# Allegro board oboard.brd
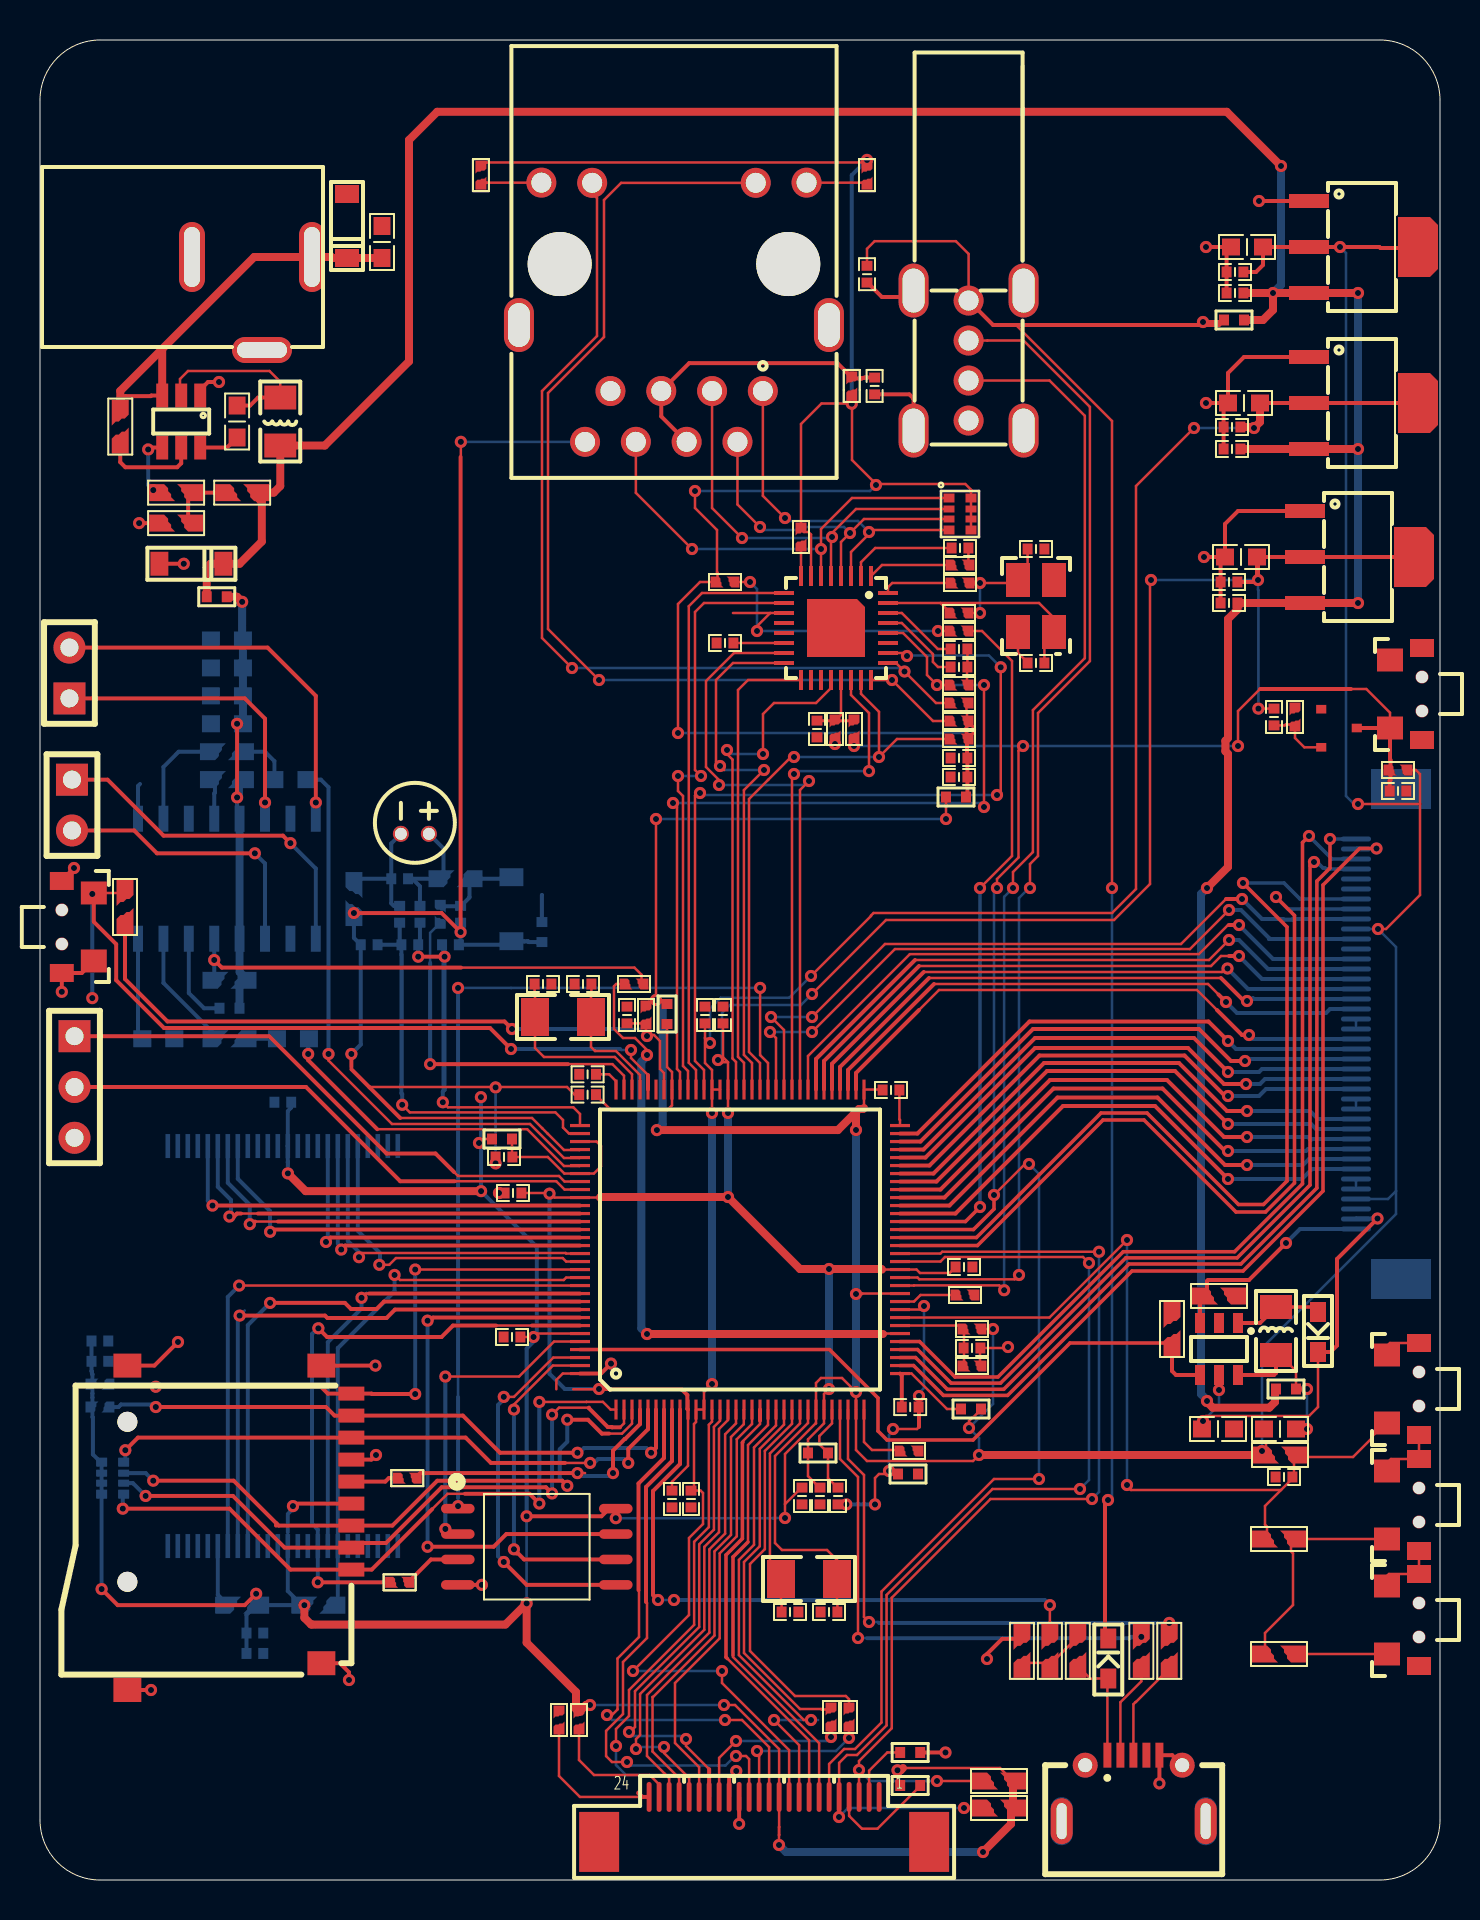
[diagram p0: board, top side]
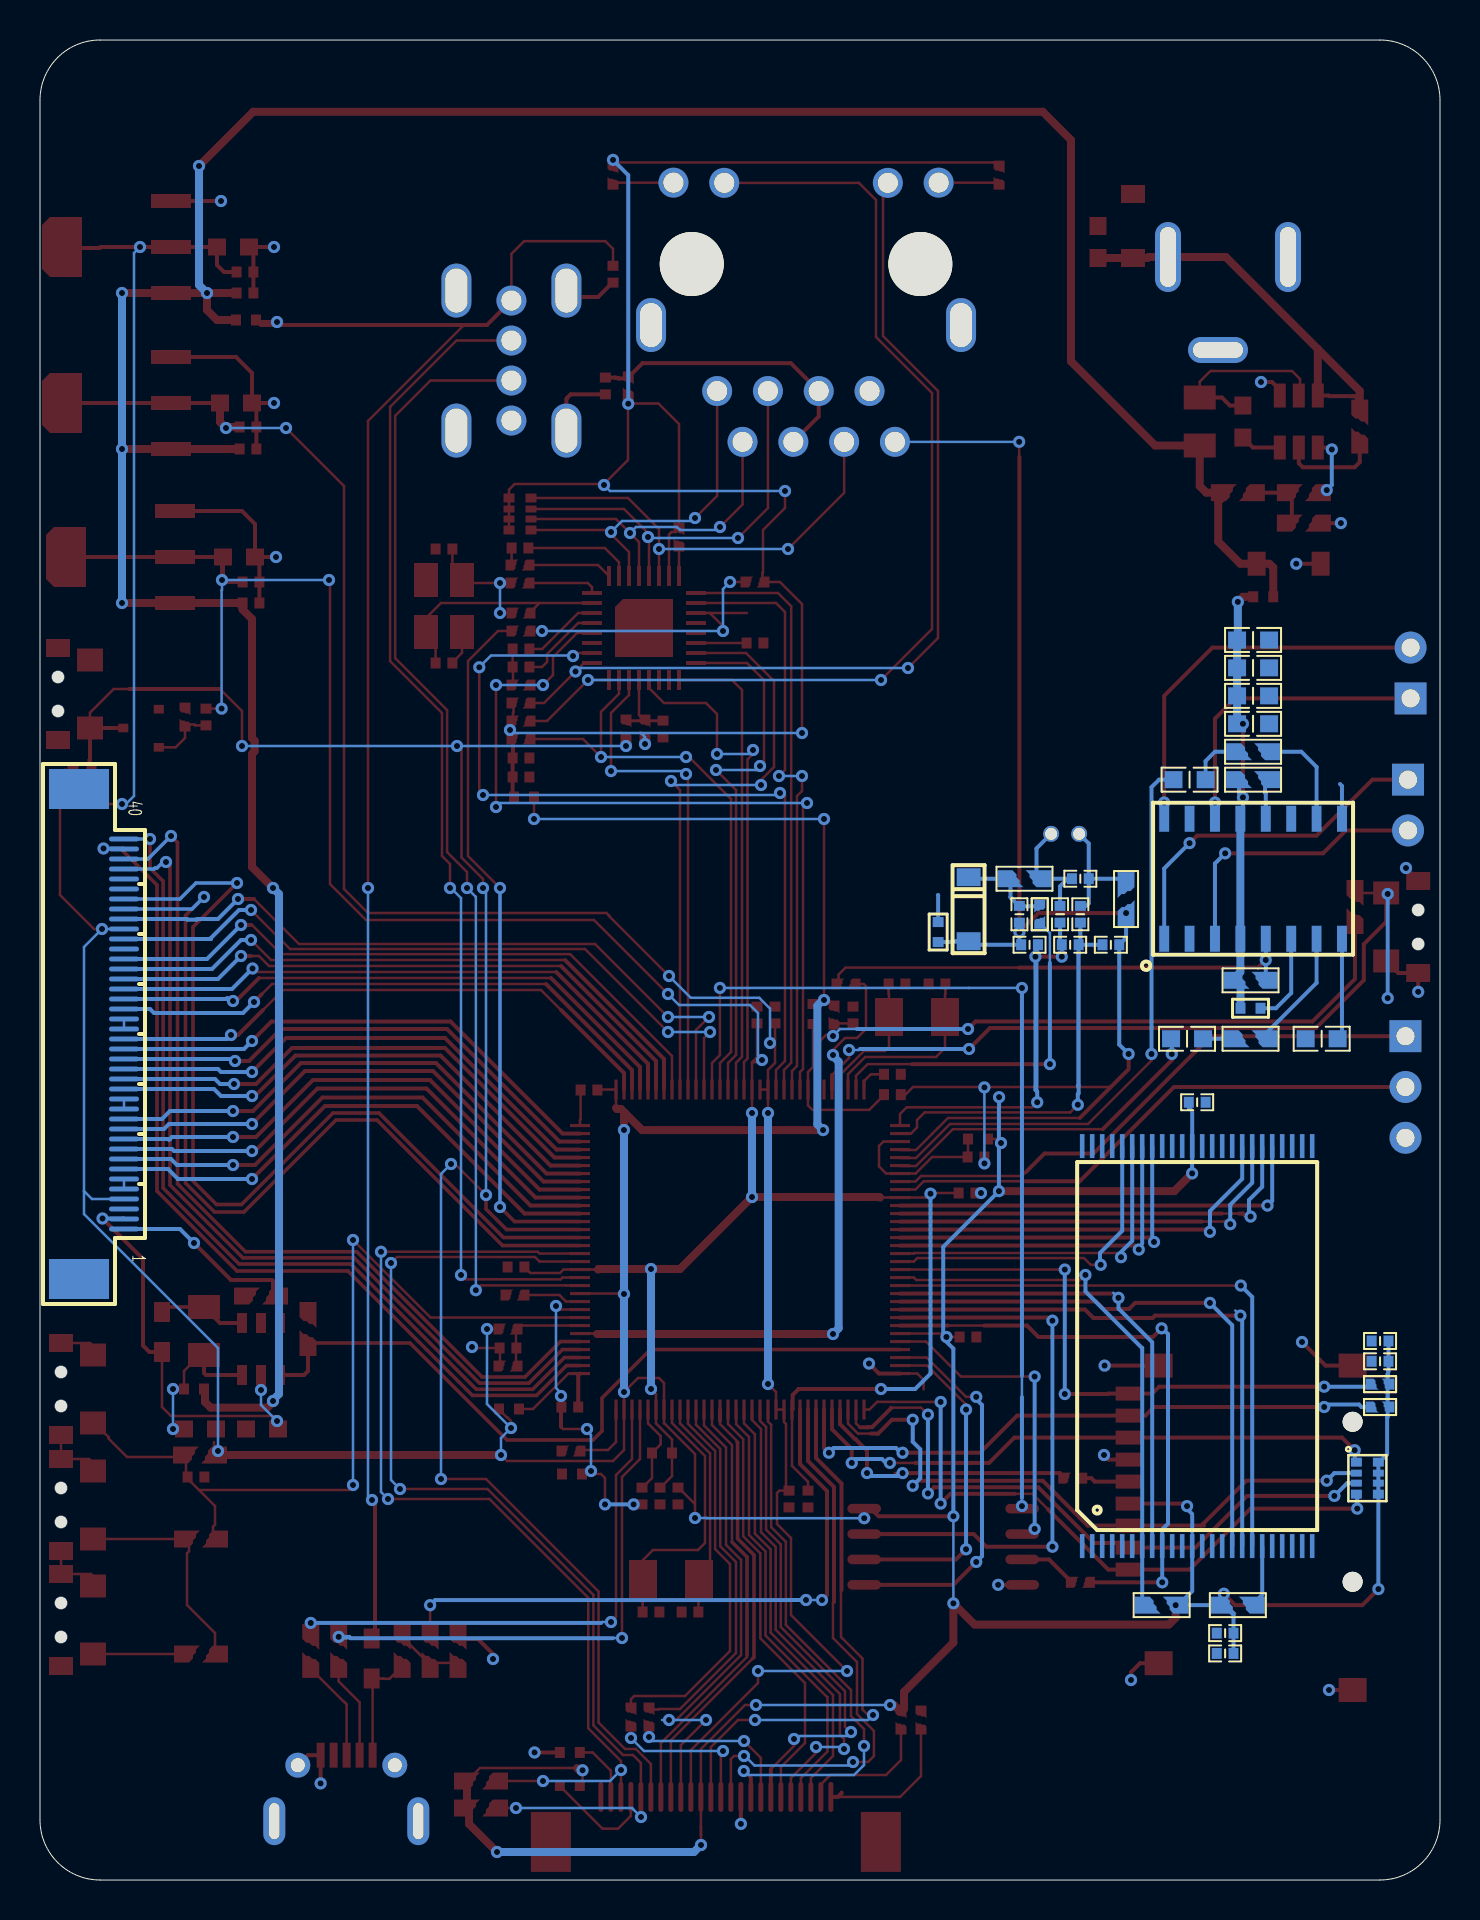
[diagram p1: board, bottom side, seen from below]

Outline 70 x 92 mm; copper layers: TOP, BOTTOM. Coordinates in mm from the lower left corner of the outline.
Outline path: 0,89 0,3 arc(0.88,0.88) 3,0 67,0 arc(69.12,0.88) 70,3 70,89 arc(69.12,91.12) 67,92 3,92 arc(0.88,91.12) 0,89

## Design rules (mm)
constraint set DEFAULT: min track width 0.127

## Placement (name value [footprint] x y rotation side)
C1  1uF  [CAP0402]  27.38 40.28 180 top
C2  15pF  [CAP0402]  27.15 44.8 180 top
C3  15pF  [CAP0402]  25.15 44.8 0 top
C4  15pF  [CAP0402]  39.45 13.4 180 top
C5  15pF  [CAP0402]  37.5 13.4 0 top
C6  0.1uF  [CAP0402]  46.6 26.6 0 top
C7  100nF  [CAP0402]  29.35 43.25 90 top
C8  100nF  [CAP0402]  34.15 43.25 90 top
C9  100nF  [CAP0402]  23.2 36.15 180 top
C11  100nF  [CAP0402]  46.2 30.65 0 top
C12  0.1uF  [CAP0402]  61.7 58.15 270 top
C14  100nF  [CAP0402]  42.55 39.5 0 top
C15  100nF  [CAP0402]  39 19.2 270 top
C16  0.1uF  [CAP0402]  67.9 54.45 0 top
C17  100nF  [CAP0402]  27.38 39.27 180 top
C18  100nF  [CAP0402]  10.74 11.33 0 bottom
C19  100nF  [CAP0402]  31.6 19.05 270 top
C20  100nF  [CAP0402]  43.51 23.65 0 top
C21  100nF  [CAP0402]  38.1 19.2 270 top
C22  100nF  [CAP0402]  23.65 34.35 180 top
C23  100nF  [CAP0402]  39.9 19.2 270 top
C24  100nF  [CAP0402]  23.6 27.15 180 top
C25  100nF  [CAP0402]  32.55 19.05 270 top
C26  100nF  [CAP0402]  33.25 43.25 90 top
C29  0.01uF  [CAP0402]  10.74 12.34 0 bottom
C30  0.01uF  [CAP0402]  12.14 38.89 180 bottom
C31  0.01uF  [CAP0402]  3 26.95 180 bottom
C32  0.01uF  [CAP0402]  3 25.93 180 bottom
C33  1uF  [CAP0603]  62 22.55 180 top
C34  0.22uF  [CAP0603]  58.9 22.55 0 top
C35  10uF  [CAP0603]  9.35 60.61 180 bottom
C36  1uF  [CAP0603]  9.35 62 180 bottom
C37  10uF  [CAP0603]  9.35 57.81 180 bottom
C38  1uF  [CAP0603]  9.35 59.21 180 bottom
C39  104  [CAP0402]  62.2 20.15 180 top
C40  220nF  [CAP0603]  12.65 42.06 180 bottom
C41  220nF  [CAP0603]  12.52 55.02 0 bottom
C42  1uF  [CAP0603]  5.92 42.06 180 bottom
C43  2.2uF  [CAP3216]  23.57 48.54 270 bottom
C44  100nF  [CAP0402]  21.03 48.29 270 bottom
C45  2.2uF  [CAP0402]  19 48.29 270 bottom
C46  470pF  [CAP0402]  18.49 46.76 0 bottom
C47  330pF  [CAP0402]  17.98 50.06 0 bottom
C48  2.2uF  [CAP0402]  17.98 48.29 270 bottom
C49  330pF  [CAP0402]  20.52 46.76 0 bottom
C50  330pF  [CAP0402]  16.46 46.76 180 bottom
C51  100nF  [CAP0402]  45.95 56.1 180 top
C52  100nF  [CAP0402]  45.95 60.65 180 top
C53  100nF  [CAP0402]  45.95 61.55 0 top
C54  100nF  [CAP0402]  45.95 55.15 180 top
C55  100nF  [CAP0402]  46 66.6 180 top
C56  100nF  [CAP0402]  34.25 61.85 180 top
C57  100nF  [CAP0402]  41.73 74.7 270 top
C58  20pF  [CAP0402]  49.8 60.85 0 top
C59  100nF  [CAP0402]  38.85 57.55 270 top
C60  20pF  [CAP0402]  49.8 66.55 180 top
C61  100nF  [CAP0402]  59.75 79.35 180 top
C62  2.2uF  [CAP0603]  60.35 81.65 180 top
C63  100nF  [CAP0402]  59.75 80.4 180 top
C64  100nF  [CAP0402]  59.6 71.55 180 top
C65  2.2uF  [CAP0603]  60.2 73.85 180 top
C66  100nF  [CAP0402]  59.6 72.65 180 top
C67  100nF  [CAP0402]  59.45 63.85 180 top
C68  2.2uF  [CAP0603]  60.05 66.15 180 top
C69  100nF  [CAP0402]  59.45 64.9 180 top
C70  1uF  [CAP0603]  9.85 72.92 270 top
C71  22uF  [CAP3216]  7.57 65.81 180 top
C72  6V/22uF  [CAP3216]  15.35 82.7 90 top
C73  6V/0.1uF  [CAP0603]  17.1 81.9 90 top
C74  0.1uF  [CAP0402]  41.35 80.29 270 top
D1  1N4148  [1N4148-SOD323]  63.9 27.4 90 top
D2  1N4148  [1N4148-SOD323]  53.41 11.08 270 top
J1  -  [TF-SOCKET]  15.57 15.52 270 top
J2  LCD_RGB_40P  [FPC-40]  68.15 42.3 270 bottom
J3  OV2640_DVP_24P  [FPC-24]  32.21 1.8 0 top
J4  Speaker Left  [HEADER1X2_2_54]  1.6 55.02 0 top
J5  Speaker Right  [HEADER1X2_2_54]  1.47 59.08 180 top
J6  Debug  [HEADER1X3_2_54]  1.73 42.19 0 top
J8  RJ45  [RJ45_13F-64GYDP2NL]  31.7 71.91 180 top
J9  USB  [USB-AF]  46.43 75.97 0 top
J10  USB  [MICROUSB]  54.69 5.74 180 top
J11  DC 005 25A  [DC_005_25A]  0.1 81.15 0 top
L1  BLM15AG102  [BLM15AG221SN1D]  23.1 37.05 0 top
L2  BLM15AG102  [BLM15AG221SN1D]  31.35 43.3 270 top
L3  22uH  [MLF2012]  61.8 27.45 90 top
L4  10uH  [BLM15AG221SN1D]  9.47 43.59 180 bottom
L5  BLM15AG102  [BLM15AG221SN1D]  45.8 54.15 0 top
L6  4.7uH  [MLF2012]  12.01 72.92 270 top
L7  BLM15AG102  [BLM15AG221SN1D]  8.84 64.16 180 top
L8  BLM15AG102  [BLM15AG221SN1D]  46.55 23.55 0 top
L9  BLM15AG102  [BLM15AG221SN1D]  38.9 21.35 180 top
L10  BLM15AG102  [BLM15AG221SN1D]  25.09 47.4 90 bottom
L11  BLM15AG102  [BLM15AG221SN1D]  59.7 78 180 top
L12  BLM15AG102  [BLM15AG221SN1D]  62.3 24.55 0 top
L13  BLM15AG102  [BLM15AG221SN1D]  43.51 4.73 180 top
L14  BLM15AG102  [BLM15AG221SN1D]  43.51 6.38 0 top
L15  BLM15AG102  [BLM15AG221SN1D]  43.4 20.3 0 top
Q1  SS8050  [SOT23]  64.95 57.6 0 top
R1  12.1K 1%  [RES0402]  43.45 21.45 0 top
R2  12.1K 1%  [RES0402]  46.25 29.25 0 top
R3  0R  [RES0402]  30.3 43.25 270 top
R4  100K  [RES0603]  4.25 48.65 90 top
R5  1K/DNP  [RES0402]  46.6 27.55 180 top
R6  10K/DNP  [RES0402]  46.6 25.7 0 top
R7  100K  [RES0402]  67.9 55.5 0 top
R8  10K  [RES0402]  62.75 58.15 90 top
R9  100K  [RES0603]  13.92 13.74 0 bottom
R10  100K  [RES0603]  10.11 13.74 180 bottom
R11  0R  [RES0402]  17.98 14.89 0 top
R12  100K  [RES0402]  3 23.65 180 bottom
R13  100K  [RES0402]  3 24.79 180 bottom
R14  22R  [RES0402]  18.36 20.09 180 top
R15  22R  [RES0402]  40.45 8.15 270 top
R16  22R  [RES0402]  39.55 8.15 270 top
R17  0R/DNP  [RES0402]  26.95 8 270 top
R18  0R/DNP  [RES0402]  25.95 8 270 top
R19  10K  [RES0603]  47.95 3.6 180 top
R20  10K  [RES0603]  47.95 4.95 180 top
R21  5R1  [RES0603]  58.95 29.2 0 top
R22  100K  [RES0603]  56.6 27.55 90 top
R23  100K  [RES0603]  62 21.25 180 top
R24  10K  [RES0603]  9.35 55.02 0 bottom
R25  10K  [RES0603]  61.95 17.05 0 top
R26  10K  [RES0603]  61.95 11.3 0 top
R28  10K  [RES0603]  9.47 42.06 180 bottom
R29  10K  [RES0603]  9.35 56.41 0 bottom
R30  10K  [RES0603]  9.47 44.98 180 bottom
R31  0R  [RES0402]  29.7 44.8 0 top
R32  0R  [RES0402]  20.01 48.29 90 bottom
R33  1.5K  [RES0603]  20.78 50.06 180 bottom
R34  5.1K  [RES0603]  15.7 49.05 90 bottom
R35  0R  [RES0402]  40.59 74.7 270 top
R36  0R  [RES0402]  45.95 62.45 180 top
R37  0R  [RES0402]  40.7 57.55 90 top
R38  10K  [RES0402]  39.75 57.55 90 top
R39  0R  [RES0402]  46 65.75 180 top
R40  1M  [RES0402]  45.95 63.35 0 top
R41  0R  [RES0402]  46 64.85 0 top
R42  4.7K  [RES0402]  38.05 67.15 90 top
R43  4.7K  [RES0402]  34.25 64.9 180 top
R44  4.7K  [RES0402]  45.95 57.05 0 top
R45  4.7K  [RES0402]  45.95 58.85 0 top
R46  330R  [RES0402]  22.05 85.24 90 top
R47  4.7K  [RES0402]  45.95 57.95 0 top
R48  330R  [RES0402]  41.35 85.24 90 top
R49  4.7K  [RES0402]  45.95 59.75 180 top
R50  100K  [RES0603]  4.01 72.67 270 top
R51  40.2K  [RES0603]  10.11 69.37 180 top
R52  75K  [RES0603]  6.81 69.37 0 top
R53  13K  [RES0603]  6.81 67.84 0 top
R54  22R  [RES0603]  55.07 11.46 90 top
R55  22R  [RES0603]  56.46 11.46 90 top
R56  10K  [RES0603]  50.49 11.46 90 top
R57  10K  [RES0603]  51.89 11.46 90 top
R58  22K  [RES0603]  49.1 11.46 90 top
RN1  10K 0402 RESAR  [RN4D02_0402]  3.63 20.09 270 bottom
RN2  49.9R 0402 RESAR  [RN4D02_0402]  46 68.3 270 top
SW1  TS_018-4.55x3.5x1.8  [TS_018-4P55X3P5X1P8]  1.09 47.65 180 top
SW2  TS_018-4.55x3.5x1.8  [TS_018-4P55X3P5X1P8]  69.1 59.3 0 top
SW3  TS_018-4.55x3.5x1.8  [TS_018-4P55X3P5X1P8]  68.95 24.55 0 top
SW4  TS_018-4.55x3.5x1.8  [TS_018-4P55X3P5X1P8]  68.95 18.75 0 top
SW5  TS_018-4.55x3.5x1.8  [TS_018-4P55X3P5X1P8]  68.95 13 0 top
U1  N3292xUxDN  [N3292XUXDN-LQFP128]  35 31.52 90 top
U2  W29N01  [W290XHVSINA-TSOP48]  12.14 26.7 90 bottom
U3  W25QXX  [W25QXX_SOP8_208MIL]  24.84 16.66 0 top
U4  PT4101  [PT4101-SOT23-6]  58.95 26.55 270 top
U5  PAM8403  [PAM8403-SOP16]  9.35 50.06 90 bottom
U6  MIC  [GMI4015-MIC]  18.74 52.86 270 top
U7  RT8201F-QFN32  [RTL8201-QFN32]  39.8 62.6 270 top
U8  AMS1117-SOT223-3-3V3  [AMS1117-SOT223-3]  66.1 81.65 270 top
U9  AMS1117-SOT223-3-1V8  [AMS1117-SOT223-3]  66.1 73.85 270 top
U10  AMS1117-SOT223-3-1V2  [AMS1117-SOT223-3]  65.9 66.15 270 top
U11  MP1470  [MP1470-TSOT23-6]  7.06 72.92 180 top
Y1  32768Hz  [CRYSTAL-3215]  26.15 43.15 180 top
Y2  12MHz  [CRYSTAL-3215]  38.45 15.05 180 top
Y3  25MHz  [YSX321SL-3_2X2_5X0_8]  49.8 63.7 90 top

## Library data of the parts
C1-C9 C11 C12 C14-C26 C29-C32 C51-C57 C59 C61 C63 C64 C66 C67 C69 C74 = CAP NP
C33-C42 C44 C46 C47 C49 C50 C58 C60 C70-C73 = CAPACITOR NON-POL
C43 C45 C48 C62 C65 C68 = CAP POL
D1 D2 = DIODE
J1 = TF-SOCKET
J2 = LCD_RGB_40P
J3 = OV2640_DVP_24P
J4 J5 = HEADER 2
J6 = HEADER 3
J8 = RJ45
J9 = USB AF
J10 = MICROUSB
J11 = DC005-25A
L1 L2 L5 L7-L15 = INDUCTOR
L3 L4 L6 = INDUCTOR/SM
Q1 = BPW37/TO
R1-R20 R35-R39 R54-R58 = RESISTOR
R21-R26 R28-R34 R40-R53 = RESISTOR/SM
RN1 RN2 = RESAR_IS_4/SM
SW1-SW5 = TS_018-4.55x3.5x1.8
U1 = N3292xUxDN
U2 = W29N01 GVSCAA
U3 = W25QXX
U4 = PT4101
U5 = PAM8403
U6 = MIC
U7 = RT8201F-QFN32
U8-U10 = ASM1117-SOT223-3
U11 = MP1470
Y1 Y2 = CRYSTAL
Y3 = YSX321SL

## Footprints (pads in the part's own frame, mm; a bottom-side part is the same pattern mirrored in y, then rotated)
1N4148-SOD323
  custom 1x0.8 smd: 1(-1,0) 2(1,0)
AMS1117-SOT223-3
  custom 0.7x2 smd: 1(-2.3,-2.65) 2(0,-2.65) 3(2.3,-2.65)
  custom 3x2 smd: 4(0,2.8)
BLM15AG221SN1D
  custom 0.5x0.55 smd: 1(-0.5,0) 2(0.5,0)
CAP0402
  custom 0.5x0.55 smd: 1(-0.42,0) 2(0.42,0)
CAP0603
  custom 0.9x0.85 smd: 1(-0.8,0) 2(0.8,0)
CAP3216
  custom 0.9x1.2 smd: 1(-1.6,0) 2(1.6,0)
CRYSTAL-3215
  custom 1.4x1.9 smd: 1(-1.4,0) 2(1.4,0)
DC_005_25A
  oval 1.3x3.5 hole 0.8x3: 1(13.5,0) 2(7.5,0)
  oval 3x1.3 hole 2.5x0.8: 3(11,-4.65)
FPC-24
  rect 2x3 smd: (-4.25,0.1) (12.25,0.1)
  oval 0.25x1.5 smd: 1(9.75,2.35) 2(9.25,2.35) 3(8.75,2.35) 4(8.25,2.35) 5(7.75,2.35) 6(7.25,2.35) 7(6.75,2.35) 8(6.25,2.35) 9(5.75,2.35) 10(5.25,2.35) 11(4.75,2.35) 12(4.25,2.35) 13(3.75,2.35) 14(3.25,2.35) 15(2.75,2.35) 16(2.25,2.35) 17(1.75,2.35) 18(1.25,2.35) 19(0.75,2.35) 20(0.25,2.35) 21(-0.25,2.35) 22(-0.75,2.35) 23(-1.25,2.35) 24(-1.75,2.35)
FPC-40
  rect 2x3 smd: (-12.25,0.1) (12.25,0.1)
  oval 0.25x1.5 smd: 1(9.75,2.35) 2(9.25,2.35) 3(8.75,2.35) 4(8.25,2.35) 5(7.75,2.35) 6(7.25,2.35) 7(6.75,2.35) 8(6.25,2.35) 9(5.75,2.35) 10(5.25,2.35) 11(4.75,2.35) 12(4.25,2.35) 13(3.75,2.35) 14(3.25,2.35) 15(2.75,2.35) 16(2.25,2.35) 17(1.75,2.35) 18(1.25,2.35) 19(0.75,2.35) 20(0.25,2.35) 21(-0.25,2.35) 22(-0.75,2.35) 23(-1.25,2.35) 24(-1.75,2.35) 25(-2.25,2.35) 26(-2.75,2.35) 27(-3.25,2.35) 28(-3.75,2.35) 29(-4.25,2.35) 30(-4.75,2.35) 31(-5.25,2.35) 32(-5.75,2.35) 33(-6.25,2.35) 34(-6.75,2.35) 35(-7.25,2.35) 36(-7.75,2.35) 37(-8.25,2.35) 38(-8.75,2.35) 39(-9.25,2.35) 40(-9.75,2.35)
GMI4015-MIC
  round 0.8 hole 0.6: 1(0.55,0.7) 2(0.55,-0.7)
HEADER1X2_2_54
  rect 1.6x1.6 hole 0.9: 1(0,0)
  round 1.6 hole 0.9: 2(0,-2.54)
HEADER1X3_2_54
  rect 1.6x1.6 hole 0.9: 1(0,0)
  round 1.6 hole 0.9: 2(0,-2.54) 3(0,-5.08)
MICROUSB
  rect 0.4x1.25 smd: 1(1.315,-0.5) 2(0.665,-0.5) 3(0.015,-0.5) 4(-0.635,-0.5) 5(-1.285,-0.5)
  round 1.25 hole 0.7: 6(-2.425,0) 7(2.425,0)
  oval 1.1x2.3 hole 0.5x1.8: 8(-3.6,2.8) 9(3.6,2.8)
MLF2012
  custom 1.2x1.6 smd: 1(-1.2,0) 2(1.2,0)
MP1470-TSOT23-6
  custom 0.6x1.2 smd: 1(-0.95,-1.3) 2(0,-1.3) 3(0.95,-1.3) 4(0.95,1.3) 5(0,1.3) 6(-0.95,1.3)
N3292XUXDN-LQFP128
  custom 1x0.16 smd: 1(-8,6.2) 2(-8,5.8) 3(-8,5.4) 4(-8,5) 5(-8,4.6) 6(-8,4.2) 7(-8,3.8) 8(-8,3.4) 9(-8,3) 10(-8,2.6) 11(-8,2.2) 12(-8,1.8) 13(-8,1.4) 14(-8,1) 15(-8,0.6) 16(-8,0.2) 17(-8,-0.2) 18(-8,-0.6) 19(-8,-1) 20(-8,-1.4) 21(-8,-1.8) 22(-8,-2.2) 23(-8,-2.6) 24(-8,-3) 25(-8,-3.4) 26(-8,-3.8) 27(-8,-4.2) 28(-8,-4.6) 29(-8,-5) 30(-8,-5.4) 31(-8,-5.8) 32(-8,-6.2) 65(8,-6.2) 66(8,-5.8) 67(8,-5.4) 68(8,-5) 69(8,-4.6) 70(8,-4.2) 71(8,-3.8) 72(8,-3.4) 73(8,-3) 74(8,-2.6) 75(8,-2.2) 76(8,-1.8) 77(8,-1.4) 78(8,-1) 79(8,-0.6) 80(8,-0.2) 81(8,0.2) 82(8,0.6) 83(8,1) 84(8,1.4) 85(8,1.8) 86(8,2.2) 87(8,2.6) 88(8,3) 89(8,3.4) 90(8,3.8) 91(8,4.2) 92(8,4.6) 93(8,5) 94(8,5.4) 95(8,5.8) 96(8,6.2)
  custom 0.16x1 smd: 33(-6.2,-8) 34(-5.8,-8) 35(-5.4,-8) 36(-5,-8) 37(-4.6,-8) 38(-4.2,-8) 39(-3.8,-8) 40(-3.4,-8) 41(-3,-8) 42(-2.6,-8) 43(-2.2,-8) 44(-1.8,-8) 45(-1.4,-8) 46(-1,-8) 47(-0.6,-8) 48(-0.2,-8) 49(0.2,-8) 50(0.6,-8) 51(1,-8) 52(1.4,-8) 53(1.8,-8) 54(2.2,-8) 55(2.6,-8) 56(3,-8) 57(3.4,-8) 58(3.8,-8) 59(4.2,-8) 60(4.6,-8) 61(5,-8) 62(5.4,-8) 63(5.8,-8) 64(6.2,-8) 97(6.2,8) 98(5.8,8) 99(5.4,8) 100(5,8) 101(4.6,8) 102(4.2,8) 103(3.8,8) 104(3.4,8) 105(3,8) 106(2.6,8) 107(2.2,8) 108(1.8,8) 109(1.4,8) 110(1,8) 111(0.6,8) 112(0.2,8) 113(-0.2,8) 114(-0.6,8) 115(-1,8) 116(-1.4,8) 117(-1.8,8) 118(-2.2,8) 119(-2.6,8) 120(-3,8) 121(-3.4,8) 122(-3.8,8) 123(-4.2,8) 124(-4.6,8) 125(-5,8) 126(-5.4,8) 127(-5.8,8) 128(-6.2,8)
PAM8403-SOP16
  custom 1.3x0.5 smd: 1(-3,4.445) 2(-3,3.175) 3(-3,1.905) 4(-3,0.635) 5(-3,-0.635) 6(-3,-1.905) 7(-3,-3.175) 8(-3,-4.445) 9(3,-4.445) 10(3,-3.175) 11(3,-1.905) 12(3,-0.635) 13(3,0.635) 14(3,1.905) 15(3,3.175) 16(3,4.445)
PT4101-SOT23-6
  custom 1x0.5 smd: 1(-1.3,0.95) 2(-1.3,0) 3(-1.3,-0.95) 4(1.3,-0.95) 5(1.3,0) 6(1.3,0.95)
RES0402
  custom 0.65x0.55 smd: 1(-0.4,0) 2(0.4,0)
RES0603
  custom 1.3x0.85 smd: 1(-0.7,0) 2(0.7,0)
RJ45_13F-64GYDP2NL
  round 1.5 hole 1: 1(-4.445,-2.54) 2(-3.175,0) 3(-1.905,-2.54) 4(-0.635,0) 5(0.635,-2.54) 6(1.905,0) 7(3.175,-2.54) 8(4.445,0) 9(-6.63,-12.96) 10(-4.09,-12.95) 11(4.09,-12.95) 12(6.63,-12.96)
  round 3.201 hole 3.2: M1(-5.715,-8.89) M2(5.715,-8.89)
  oval 1.5x2.7 hole 1.1x2.2: M3(-7.75,-5.84) M4(7.75,-5.84)
RN4D02_0402
  rect 0.45x0.55 smd: 1(-0.8,-0.55) 4(0.8,-0.55) 5(0.8,0.55) 8(-0.8,0.55)
  rect 0.35x0.55 smd: 2(-0.25,-0.55) 3(0.25,-0.55) 6(0.25,0.55) 7(-0.25,0.55)
RTL8201-QFN32
  custom 1x0.2 smd: 1(-2.6,1.75) 2(-2.6,1.25) 3(-2.6,0.75) 4(-2.6,0.25) 5(-2.6,-0.25) 6(-2.6,-0.75) 7(-2.6,-1.25) 8(-2.6,-1.75) 17(2.6,-1.75) 18(2.6,-1.25) 19(2.6,-0.75) 20(2.6,-0.25) 21(2.6,0.25) 22(2.6,0.75) 23(2.6,1.25) 24(2.6,1.75)
  custom 0.2x1 smd: 9(-1.75,-2.6) 10(-1.25,-2.6) 11(-0.75,-2.6) 12(-0.25,-2.6) 13(0.25,-2.6) 14(0.75,-2.6) 15(1.25,-2.6) 16(1.75,-2.6) 25(1.75,2.6) 26(1.25,2.6) 27(0.75,2.6) 28(0.25,2.6) 29(-0.25,2.6) 30(-0.75,2.6) 31(-1.25,2.6) 32(-1.75,2.6)
  custom 2.9x2.9 smd: 33(0,0)
SOT23
  rect 0.508x0.432 smd: 1(-0.889,0.94) 2(-0.889,-0.965) 3(0.889,0)
TF-SOCKET
  round 1 hole 1.1 unplated: (-7.39,-11.2) (0.61,-11.2)
  rect 0.7x1.3 smd: 1(0,0) 2(-1.1,0) 3(-2.2,0) 4(-3.3,0) 5(-4.4,0) 6(-5.5,0) 7(-6.6,0) 8(-7.7,0) 9(-8.8,0)
  rect 1.2x1.4 smd: 10(-10.2,-1.5) 11(4.68,-1.5) 12(-10.2,-11.2) 13(6.02,-11.2)
TS_018-4P55X3P5X1P8
  round 0.65 hole 0.6: (0,0.85) (0,-0.85)
  custom 1.2x0.9 smd: 1(0,2.3) 2(0,-2.3)
  custom 1.3x1.15 smd: 3(-1.6,1.7) 4(-1.6,-1.7)
USB-AF
  round 1.5 hole 1: 1(0,3) 2(0,1) 3(0,-1) 4(0,-3)
  oval 1.5x2.7 hole 1.1x2.2: 5(-2.75,3.5) 6(2.75,3.5) 7(-2.75,-3.5) 8(2.75,-3.5)
W25QXX_SOP8_208MIL
  custom 1.68x0.48 smd: 1(-3.95,1.905) 2(-3.95,0.635) 3(-3.95,-0.635) 4(-3.95,-1.905) 5(3.95,-1.905) 6(3.95,-0.635) 7(3.95,0.635) 8(3.95,1.905)
W290XHVSINA-TSOP48
  custom 1.2x0.23 smd: 1(-10,5.75) 2(-10,5.25) 3(-10,4.75) 4(-10,4.25) 5(-10,3.75) 6(-10,3.25) 7(-10,2.75) 8(-10,2.25) 9(-10,1.75) 10(-10,1.25) 11(-10,0.75) 12(-10,0.25) 13(-10,-0.25) 14(-10,-0.75) 15(-10,-1.25) 16(-10,-1.75) 17(-10,-2.25) 18(-10,-2.75) 19(-10,-3.25) 20(-10,-3.75) 21(-10,-4.25) 22(-10,-4.75) 23(-10,-5.25) 24(-10,-5.75) 25(10,-5.75) 26(10,-5.25) 27(10,-4.75) 28(10,-4.25) 29(10,-3.75) 30(10,-3.25) 31(10,-2.75) 32(10,-2.25) 33(10,-1.75) 34(10,-1.25) 35(10,-0.75) 36(10,-0.25) 37(10,0.25) 38(10,0.75) 39(10,1.25) 40(10,1.75) 41(10,2.25) 42(10,2.75) 43(10,3.25) 44(10,3.75) 45(10,4.25) 46(10,4.75) 47(10,5.25) 48(10,5.75)
YSX321SL-3_2X2_5X0_8
  custom 1.7x1.2 smd: 1(-1.3,-0.9) 2(1.3,-0.9) 3(1.3,0.9) 4(-1.3,0.9)

## Nets
AVDD1V2: C23.1 L9.1 U1.28
AVDD3V3: C20.1 L8.1 U1.33
AVDD3V3_AUDIO: C9.1 L1.2 U1.99 U1.103
AVDD3V3_TV: C17.1 L2.2 U1.89
AVDD5V: C35.1 C36.1 C37.1 C38.1 L4.1 L7.1 R24.2 R30.1 U5.4 U5.13
DVDD1V2: C8.1 C11.1 C12.1 C15.1 C19.1 C22.1 C68.1 C69.1 L9.2 U1.10 U1.27 U1.46 U1.82 U1.106 U10.2 U10.4(VOUT)
DVDD1V8: C25.1 C26.1 C65.1 C66.1 J3.10 U1.11 U1.12 U1.83 U1.84 U9.2 U9.4(VOUT)
DVDD5V: C61.1 C64.1 C67.1 C71.1 L6.2 L7.2 L11.1 L12.1 R51.1 U8.3 U9.3 U10.3
DVDD33: C14.1 C18.1 C21.1 C24.1 C29.1 C30.1 C31.2 C32.2 C62.1 C63.1 J1.4(VDD) J2.4 J2.31 J3.11 L1.1 L2.1 L5.1 L8.2 L13.2 R3.1 R5.1 R7.2 R9.1 R10.1 R12.2 R13.2 R17.1 R19.1 R20.1 R23.2 RN1.5 RN1.6 RN1.7 RN1.8 U1.26 U1.31 U1.43 U1.65 U1.123 U2.12 U2.37 U3.8 U8.2 U8.4(VOUT)
GND: C1.2 C2.2 C3.2 C4.2 C5.2 C6.2 C7.2 C8.2 C11.2 C14.2 C15.2 C16.2 C18.2 C19.2 C21.2 C22.2 C24.2 C25.2 C26.2 C29.2 C30.2 C31.1 C32.1 C33.2 C34.2 C35.2 C36.2 C37.2 C38.2 C39.2 C42.1 C51.2 C52.1 C53.2 C54.2 C55.1 C56.2 C57.2 C58.1 C59.2 C60.1 C61.2 C62.2 C63.2 C64.2 C65.2 C66.2 C67.2 C68.2 C69.2 C71.2 C72.2 C73.2 C74.2 J1.6 J1.10 J1.11 J1.12 J1.13 J2.3 J2.5 J2.6 J2.13 J2.14 J2.21 J2.22 J2.29 J2.36 J3.15 J6.3 J9.4 J9.5 J9.6 J9.7 J9.8 J10.5 J10.6 J10.7 J10.8 J10.9 J11.2(COM) J11.3 L10.2 L14.2 L15.2 Q1.1(EMITTER) R1.2 R2.2 R6.2 R8.2 R18.1 R21.2 R22.2 R39.1 R49.1 R53.1 R58.2 SW1.1 SW1.2 SW1.3 SW2.1 SW2.2 SW2.3 SW3.1 SW3.2 SW3.3 SW4.1 SW4.2 SW4.3 SW5.1 SW5.2 SW5.3 U1.64 U1.128 U2.13 U2.36 U3.4 U4.2 U5.2 U5.9 U5.11 U5.15 U7.33 U8.1 U9.1 U10.1 U11.1 Y3.2 Y3.4
GND_FIELD SIGNAL: C20.2 C23.2 L15.1 U1.41
GND_SIGNAL: C9.2 C17.2 C43.2 C44.2 C49.2 C50.2 J8.8 L10.1 R34.1 U1.100
PVIN: C72.1 C73.1 J11.1 R50.1 U11.3
VBUS: C74.1 D2.1(K) J9.1(VBUS) L11.2
ADC_MID: C1.1 U1.96
AHS: C6.1 R5.2 R6.1 U1.39
BL_5V: C33.1 L3.1 L12.2 U4.6
BL_ADJ: R22.1 U1.125 U4.4
DEBUG_RX: J6.2 U1.105
DEBUG_TX: J6.1 U1.104
ETH_CRS: U1.85 U7.26
ETH_INT: R36.1 U1.52
ETH_INT_PU: R36.2 R43.1 U7.11
ETH_LED0+: J8.9 R48.1
ETH_LED0-: J8.10 R47.1 U7.24
ETH_LED1+: J8.12 R46.1
ETH_LED1-: J8.11 R45.1 U7.25
ETH_MDC: U1.74 U7.22
ETH_MDIO: R44.1 U1.78 U7.23
ETH_REFCLK: U1.73 U7.15
ETH_RESET: C16.1 J3.6 Q1.3 R7.1 R37.1 SW2.4 U1.51
ETH_RXD0: U1.86 U7.9
ETH_RXD1: U1.87 U7.10
ETH_RXDV: R42.1 U7.8
ETH_RXER: R49.2 U1.88 U7.28
ETH_TXD0: U1.79 U7.16
ETH_TXD1: U1.80 U7.17
ETH_TXEN: U1.81 U7.20(TXEN)
ETH_VCCD: C51.1 C54.1 L5.2 R35.2 R38.1 R42.2 R43.2 R44.2 R45.2 R46.2 R47.2 R48.2 RN2.5 RN2.6 RN2.7 RN2.8 U7.7
GPG7: R31.1 U1.38
HPOUTL: C40.1 U1.102
HPOUTR: C41.2 U1.101
ISI_HSYNC: J3.9 U1.21
ISI_PCLK: R16.1 U1.22
ISI_PWDN: J3.8 U1.19
ISI_SCL: J3.5 R19.2 U1.47
ISI_SCLK: R15.1 U1.23
ISI_SDA: J3.3 R20.2 U1.48
ISI_VSYNC: J3.7 U1.20
LED+: C34.1 D1.1(K) J2.2 U4.5
LED-: J2.1 R21.1 U4.3
LHSYNC: J2.32 U1.75
LPCLK: J2.30 U1.76
LRADC: C39.1 R23.1 R25.1 SW3.4 U1.40
LVD0: J2.23 U1.67
LVD1: J2.24 U1.68
LVD2: J2.25 U1.69
LVD3: J2.26 U1.70
LVD4: J2.27 U1.71
LVD5: J2.28 U1.72
LVD6: J2.15 U1.59
LVD7: J2.16 U1.60
LVD8: J2.17 U1.61
LVD9: J2.18 U1.62
LVD10: J2.19 U1.63
LVD11: J2.20 U1.66
LVD12: J2.7 U1.53
LVD13: J2.8 U1.54
LVD14: J2.9 U1.55
LVD15: J2.10 U1.56
LVD16: J2.11 U1.57
LVD17: J2.12 U1.58
LVDE: J2.34 U1.50
LVSYNC: J2.33 U1.49
MIC_BIAS: R32.1 U1.95
MIC_INN: C46.1 C48.2 C50.1 U1.98
MIC_INP: C45.2 C46.2 C49.1 U1.97
MUTE: R30.2 R31.2 U5.5
NALE: U1.120 U2.17
NBUSY0: R9.2 U1.116 U2.7
NCLE: U1.119 U2.16
NCS0: R11.1 U1.122 U2.9
NCS1: U1.121 U3.7
ND0: U1.107 U2.29
ND1: U1.108 U2.30
ND2: U1.109 U2.31
ND3: U1.110 U2.32
ND4: U1.111 U2.41
ND5: U1.112 U2.42
ND6: U1.113 U2.43
ND7: U1.114 U2.44
NRE: U1.118 U2.8
NWR: U1.117 U2.18
OUTLM: J4.2 U5.3
OUTLP: J4.1 U5.1
OUTRM: J5.1 U5.14
OUTRP: J5.2 U5.16
RTC_XIN: C2.1 U1.93 Y1.1
RTC_XOUT: C3.1 U1.94 Y1.2
RTCVDD33: C7.1 R3.2 R4.1 U1.90
SD_CD: J1.9 R13.1 U1.115
SD_CLK: R14.1 U1.4
SD_CMD: J1.3 RN1.2 U1.3
SD_D0: J1.7 RN1.1 U1.5
SD_D1: J1.8 R12.1 U1.6
SD_D2: J1.1 RN1.4 U1.1
SD_D3: J1.2 RN1.3 U1.2
SF_CLK: U1.127 U3.6
SF_CS: U1.77 U3.1
SF_DI: U1.126 U3.5
SF_DO: U1.124 U3.2
SPD0: J3.19 U1.18
SPD1: J3.21 U1.17
SPD2: J3.22 U1.16
SPD3: J3.20 U1.15
SPD4: J3.18 U1.14
SPD5: J3.16 U1.13
SPD6: J3.14 U1.8
SPD7: J3.12(Y9) U1.7
TP_XM: J2.39 U1.34
TP_XP: J2.37 U1.36
TP_YM: J2.40(YU) U1.35
TP_YP: J2.38 U1.37
UD_REXT: R1.1 U1.32
UH_DM: J9.2 U1.45
UH_DP: J9.3 U1.44
UH_REXT: R2.1 U1.42
USB_DET: R56.2 U1.9
USB_DM: R54.2 U1.29
USB_DP: R55.2 U1.30
USB_VIN: D2.2 J10.1(VBUS) R57.1
XIN: C4.1 U1.25 Y2.1
XOUT: C5.1 U1.24(XOUT) Y2.2
N04211: R10.2 U2.19(W\P\)
N06862: J1.5 R14.2
N09654: R11.2 U3.3(W\P\/IO2)
N15646006: J3.13 R15.2
N15646070: J3.17 R16.2
N15663479: C52.2 U7.29
N15663486: C55.2 U7.2
N15663493: C56.1 U7.14
N15663500: C53.1 U7.30
N15663575: C59.1 R37.2 R38.2 U7.21
N15663676: R39.2 U7.1
N15663702: R41.1 U7.32
N15664512: C60.2 R40.2 R41.2 Y3.3(XOUT)
N15664809: C58.2 R40.1 U7.31 Y3.1
N15668493: J8.1 RN2.4 U7.3
N15668513: J8.2(TD-) RN2.3 U7.4
N15668525: J8.3 RN2.2 U7.5
N15668529: J8.6 RN2.1 U7.6
N15668719: C57.1 J8.4 J8.5 R35.1
N15674337: R25.2 R26.1 SW4.4
N15674345: R26.2 SW5.4
N15676008: R24.1 U5.12
N15676062: L4.2 U5.6
N15676114: C40.2 R28.1
N15676138: R28.2 U5.7
N15676142: R29.1 U5.10
N15676150: C41.1 R29.2
N15676164: C42.2 U5.8(VREF)
N15687660: C70.2 U11.6
N15687760: C70.1 L6.1 U11.2(SW)
N15687792: R50.2 U11.5
N15687876: R51.2 R52.2 R53.2
N15687912: R52.1 U11.4
N15691835: D1.2 L3.2 U4.1(SW)
N15705525: C43.1 C44.1 R32.2 R33.1
N15705529: C45.1 C47.2 R33.2 U6.1
N15705631: C47.1 C48.1 R34.2 U6.2(-)
N15714383: J10.2 R54.1
N15714387: J10.3 R55.1
N15739714: R4.2 SW1.4 U1.92
N15742573: C12.2 Q1.2 R8.1
N15750041: R56.1 R57.2 R58.1
N15763803: J3.24 R18.2
N15763807: J3.23 R17.2
N15841040: J3.4 L13.1
N15841559: J3.2 L14.1

Pads without a net: J2 35; J3 1; J8 7 M1 M2 M3 M4; J10 4; U1 91; U2 1 2 3 4 5 6 10 11 14 15 20 21 22 23 24 25 26 27 28 33 34 35 38 39 40 45 46 47 48; U7 12 13 18 19 27

## Via types
v1: diameter 0.61, hole 0.305, TOP to BOTTOM, 292 vias

## Routing (per net, layer and track width the routed paths; a pad name or vN(x,y) marks a point on that pad's centre or on a via; arc(x,y) is an arc through that point)
AVDD1V2: length 4.6
  TOP w0.127: U1.28 39.6,22.83 38.97,22.2 38.97,21.78 L9.1 39.4,20.09 39.88,19.62 C23.1
AVDD3V3: length 5.5
  TOP w0.127: L8.1 45.35,23.55 43.58,25.32 U1.33
  TOP w0.2: C20.1 43.09,25.23 U1.33
AVDD3V3_AUDIO: length 8
  TOP w0.127: L1.2 23.6,36.17 C9.1 25.39,36.15 26.22,35.32 U1.103 27.69,35.32 28.05,35.68 28.05,36.7 27.83,36.92 U1.99
AVDD3V3_TV: length 8.4
  TOP w0.127: L2.2 31.35,40.65 31.6,40.4 U1.89 31.6,38.73 31.38,38.51 28.54,38.51 27.8,39.24 C17.1
AVDD5V: length 22.7
  TOP w0.2: v1(9.85,57.81) v1(9.85,54.13)
  TOP w0.4: v1(10.11,63.91) 9.85,64.16 L7.1
  BOTTOM w0.127: C37.1 v1(9.85,57.81)
  BOTTOM w0.2: U5.13 9.85,53.19 v1(9.85,54.13) 10.05,54.32 R24.2 ; 10.11,62.69 10.11,62.79
  BOTTOM w0.4: C37.1 C38.1 C35.1 C36.1 10.11,62.04 10.11,62.69 ; U5.13 U5.4 9.98,45.4 10.17,45.21 R30.1 9.97,44.78 L4.1 ; 10.11,62.79 v1(10.11,63.91)
DVDD1V2: length 139.5
  TOP w0.127: U1.10 32.4,20.71 31.6,19.91 C19.1 ; v1(39.45,24.55) 39.2,24.3 U1.27 39.2,22.83 38.4,22.03 L9.2 38.4,20.2 38.98,19.62 C15.1 ; C22.1 25.44,34.35 v1(25.48,34.32) 25.54,34.32 25.73,34.12 U1.106 28,34.12 ; C11.1 45.48,30.35 44,30.35 43.83,30.52 U1.46 39.4,30.52 39.43,30.55 ; 34.4,40.89 34.15,41.14 C8.1 ; 34.4,40.89 34.01,40.89 v1(33.9,41) ; 34.4,40.89 U1.82 v1(34.4,38.35) ; C12.1 v1(60.92,58.57) ; v1(38.6,44.3) 42.3,48 53.7,48 55.5,49.8 55.5,64.9 55.55,64.95 v1(55.55,65) ; 32.08,24.54 26.66,24.54
  TOP w0.2: C69.1 60.65,64.9 60.85,65.1 C68.1 ; U1.10 32.37,23.55 32.37,24.25 32.07,24.55 v1(27.95,24.55) ; C68.1 60.9,66.1 v1(60.9,65) ; C68.1 U10.2 U10.4
  TOP w0.4: v1(39.45,30.55) 42.07,30.55 42.1,30.52 ; 28,34.12 28.03,34.15 v1(34.4,34.15) 38,30.55 39.43,30.55
  BOTTOM w0.127: v1(55.55,65) v1(60.9,65) 60.9,64.5 60.92,64.48 v1(60.92,58.57) ; v1(38.6,44.3) 38.05,43.75 34.5,43.75 34.1,43.35 34.1,41.25 33.9,41.05 v1(33.9,41)
  BOTTOM w0.2: v1(27.95,24.55) 26.24,24.55 25.48,25.32 v1(25.48,34.32)
  BOTTOM w0.4: v1(34.4,34.15) v1(34.4,38.35) ; v1(39.45,24.55) v1(39.45,30.55)
DVDD1V8: length 110.8
  TOP w0.127: v1(34.1,10.45) 34.1,9.85 37.46,6.49 J3.10 ; v1(38.55,45.2) 41.55,48.2 41.55,48.22 41.68,48.35 53.6,48.35 54.8,49.55 54.8,69.7 v1(57.7,72.6) ; C26.1 33.25,42.1 ; 33.25,42.1 33.25,40.85 33.6,40.5 U1.84 ; 33.25,42.1 v1(33.5,41.85) ; U1.84 v1(33.6,38.35) ; U1.84 U1.83 ; v1(33.6,24.8) 33.2,24.4 U1.12 U1.11 32.8,22.9 32.7,22.8 32.7,19.62 C25.1 33.03,19.47 33.15,19.35 33.15,17.8 32.45,17.1 32.45,13.25 v1(29.65,10.45)
  TOP w0.2: U9.4 U9.2 C65.1
  TOP w0.4: C65.1 61,72.9 v1(60.7,72.6) 60.65,72.65 C66.1
  BOTTOM w0.127: v1(29.65,10.45) v1(34.1,10.45) ; v1(38.55,45.2) 37.46,44.11 34.04,44.11 33.5,43.57 v1(33.5,41.85) ; v1(57.7,72.6) v1(60.7,72.6)
  BOTTOM w0.4: v1(33.6,38.35) v1(33.6,24.8)
DVDD5V: length 163.4
  TOP w0.127: 59.4,57.09 59.4,56.31
  TOP w0.4: L7.2 8.34,65.62 8.53,65.81 C71.1 9.98,65.81 11.09,66.92 11.09,68.91 10.81,69.19 R51.1 11.68,69.37 12.01,69.7 L6.2 14.24,71.72 18.45,75.93 18.45,87 19.86,88.41 59.34,88.41 v1(62.05,85.7) ; v1(65.9,79.35) U8.3 v1(61.65,79.35) ; C61.1 v1(61.65,79.35) ; v1(61.65,79.35) 61.65,78.5 61.15,78 L11.1 ; v1(58.35,49.6) 59.4,50.65 59.4,56.31 59.27,56.44 59.27,56.96 59.4,57.09 59.4,63.05 59.87,63.52 C67.1 U10.3 v1(65.9,63.85) ; v1(58.35,23.95) 58.35,23.9 58.63,23.62 61.47,23.62 61.75,23.9 61.75,24.5 L12.1 ; v1(65.9,71.55) U9.3 C64.1
  BOTTOM w0.4: v1(65.9,63.85) v1(65.9,71.55) v1(65.9,79.35) ; v1(62.05,85.7) 62.05,79.75 v1(61.65,79.35) ; v1(58.35,23.95) 58.35,24 58.05,24.3 58.05,49.3 v1(58.35,49.6)
DVDD33: length 349
  TOP w0.127: v1(42.87,5.49) 42.87,4.86 L13.2 ; 61.3,21.9 61.3,21.65 v1(61.1,21.45) ; L2.1 31.25,43.9 30.8,43.9 ; 37.25,18.8 37.25,21.3 38.78,22.83 38.8,22.83 U1.26 38.8,24.85 39.05,25.1 40.1,25.1 v1(40.8,24.4) U1.31 40.8,21.5 41.35,20.95 46.65,20.95 v1(46.95,21.25) ; 37.25,18.8 38.08,19.62 C21.1 ; 37.25,18.8 v1(37.25,18.1) ; C14.1 42.11,39.52 U1.65 41.2,38.6 ; v1(46.45,22.6) 46.45,22.95 46.64,23.14 46.67,23.14 47.05,23.52 L8.2 ; v1(21.95,36.85) 22.15,37.05 L1.1 ; U1.123 24.85,27.32 v1(24.68,27.15) C24.1 ; 36.95,2.25 v1(36.95,1.75) ; 36.95,2.25 36.95,2.65 36.96,2.65 ; 36.95,2.25 36.96,2.25 36.96,2.65 ; v1(66.9,47.55) 67.3,47.55 69,49.25 69,53.8 ; 36.96,2.65 J3.11 36.96,6.54 34.75,8.75 v1(34.2,8.75) ; 69,53.8 v1(65.9,53.8) ; 69,53.8 69,55.29 68.79,55.5 R7.2 ; 13.63,12.77 13.75,12.65 23.15,12.65 23.27,12.77 ; 43.15,5.6 48,5.6 R20.1 ; v1(12.65,18.7) 12.77,18.82 12.9,18.82 ; R3.1 30.3,43.78 30.43,43.9 30.8,43.9 ; 30.8,43.9 v1(30.8,44) v1(30.8,53.05) ; v1(47.65,27.55) R5.1 ; U3.8 v1(28.79,18.09) ; v1(40.8,29.3) 41.1,29.3 41.12,29.32 U1.43 ; v1(45.3,53.05) L5.1
  TOP w0.2: v1(24.33,18.19) 28.07,18.19 28.45,18.57 U3.8 ; J1.4 12.9,18.82 ; U8.4 68.85,81.6 67.02,81.6 66.97,81.65 v1(65,81.65) U8.2 C62.1 61.15,80.75 60.8,80.4 C63.1 ; v1(10.81,14.31) 10.24,13.74 3.89,13.74 v1(3.08,14.55)
  TOP w0.4: 41.2,38.6 41.15,38.55 40.95,38.55 40.73,38.33 ; 40.73,38.33 40.8,38.25 v1(40.8,37.5) ; 40.73,38.33 39.9,37.5 v1(30.85,37.5) ; R20.1 R19.1 48.55,3.5 48.55,2.8 v1(47.15,1.4) ; v1(22.05,34.44) 13.28,34.44 v1(12.39,35.33) ; v1(27.5,8.75) 27.3,8.75 R17.1 26.8,8.55 26.8,9.4 24.33,11.87 v1(24.33,13.83) 23.27,12.77 13.55,12.77 13.22,13.11 v1(13.22,13.74) ; 43.15,5.6 43.04,5.49 v1(42.87,5.49) ; v1(46.95,21.25) R23.2 v1(61.1,21.45)
  BOTTOM w0.127: 12.39,38.39 12.39,38.45 ; 2.62,24.11 2.6,24.14 2.6,24.3 2.62,24.33 ; R10.1 v1(10.81,14.31) ; v1(21.95,36.85) 22.05,36.85 ; 12.39,35.87 12.39,35.9 12.39,35.91 ; v1(47.65,27.55) 47.65,23.8 v1(46.45,22.6) 46.95,22.1 v1(46.95,21.25) ; 12.39,18.3 12.39,18.2 ; 67.8,34.45 67.4,34.05 J2.4 ; 67.8,34.45 67.8,46.65 v1(66.9,47.55) J2.31 ; 67.8,34.45 67.8,33.3 61.1,26.6 v1(61.1,21.45) ; v1(65,81.65) 65.3,81.35 65.3,54.2 65.7,53.8 v1(65.9,53.8) ; 24.84,27.08 24.77,27.15 v1(24.68,27.15) ; v1(30.8,53.05) v1(45.3,53.05) ; v1(37.25,18.1) 36.66,18.1 36.65,18.09 v1(28.79,18.09) ; 2.6,25.41 2.6,25.45 2.58,25.47 ; 2.6,25.32 2.6,25.28 2.62,25.26 ; 22.05,38.64 22.05,38.63 22.05,38.6 ; 12.39,17.4 U2.12 ; v1(24.33,18.19) v1(24.33,13.83) ; v1(34.2,8.75) v1(27.5,8.75)
  BOTTOM w0.2: 13.09,13.74 v1(13.22,13.74) ; 13.09,13.74 12.39,14.45 U2.12 ; 13.09,13.74 R10.1 10.32,13.26 10.32,11.33 ; 12.39,38.39 U2.37 12.39,35.87 12.39,35.87 v1(12.39,35.33) ; 22.05,38.6 v1(22.05,34.44) 24.84,31.66 24.84,27.08 24.33,26.57 v1(24.33,18.19) ; v1(12.65,18.7) 12.65,18.56 12.39,18.3 ; 12.39,38.45 12.56,38.62 C30.1 ; C31.2 C32.2 2.58,25.43 2.6,25.41 2.6,25.32 2.62,25.29 2.62,24.82 R13.2 2.62,24.77 2.62,23.67 R12.2 2.62,23.62 2.62,23.15 2.65,23.12 2.65,21.28 3.03,20.89 RN1.8 RN1.7 RN1.6 RN1.5 v1(3.08,14.55) ; 12.39,18.2 12.39,17.4 ; v1(22.05,39.14) 22.05,38.64
  BOTTOM w0.4: v1(30.8,44) 30.85,44 31.13,43.72 31.13,37.78 v1(30.85,37.5) ; v1(40.8,24.4) v1(40.8,29.3) v1(40.8,37.5) ; v1(36.95,1.75) 37.3,1.4 v1(47.15,1.4)
GND: length 83.7
  TOP w0.127: C55.1 46.42,65.77 R39.1 ; Y3.4 48.9,61.36 49.38,60.88 C58.1 ; 25.82,24.54 25.82,25 26.14,25.32 U1.128 ; R49.1 46.35,60.63 C52.1 C53.2 ; SW3.2 SW4.1 67.55,21.05 67.35,20.85 SW4.3 ; SW3.1 67.5,26.85 67.35,26.7 SW3.3 ; v1(48.4,26.65) 48.35,26.6 C6.2 47,26.58 R6.2 ; U1.64 43,38 42.97,38.03 C14.2 ; SW5.3 67.35,15.2 67.45,15.3 SW5.1 SW4.2 ; C22.2 v1(22.95,34.35)
  TOP w0.2: U8.1 v1(60.95,83.95) ; 59.45,81.65 59.4,81.6 59.4,81.4 ; 59.45,81.65 C62.2 59.33,81.43 C63.2 C61.2 ; 59.45,81.65 v1(58.3,81.65) ; v1(16.8,21.25) 16.57,21.02 J1.6 ; C57.2 43.47,74.28 43.65,74.1 43.65,74.08 43.68,74.05 J9.7 ; J9.5 43.36,79.15 42.09,79.15 41.38,79.87 C74.2 ; v1(8.95,74.9) 8.4,74.9 8.01,74.51 U11.1 ; R53.1 v1(4.96,67.84) ; C65.2 59.4,75.35 60.2,76.15 U9.1 ; C65.2 v1(58.3,73.85) ; C65.2 59.18,73.63 C66.2 C64.2 ; 1.09,49.95 1.09,49.99 v1(1.7,50.6) ; v1(55.97,4.83) J10.5 56.61,6.24 J10.6 ; v1(28.55,25.82) 28.05,25.32 U1.128 ; J1.12 5.72,25.72 v1(6.9,26.9) ; R58.2 49,12.06 48.11,12.06 47.35,11.3 v1(47.35,11.05) ; J1.13 v1(5.55,9.5) ; C71.2 v1(7.19,65.81) ; L14.2 v1(45.27,6.38) ; C68.2 59.03,65.93 C69.2 C67.2 ; C68.2 v1(58.2,66.15) ; C68.2 59.25,67.8 59.9,68.45 U10.1 ; 2.69,45.95 2.09,45.35 SW1.1 v1(1.09,44.41) ; J1.11 15,10.84 15.45,10.39 v1(15.45,10) ; U3.4 v1(22.09,14.76) ; J3.15 v1(34.96,2.81) ; J1.10 v1(16.77,25.72)
  BOTTOM w0.127: J2.6 J2.5 ; J2.14 J2.13 ; J2.22 J2.21
  BOTTOM w0.2: L10.2 25.09,49.24 25.1,49.25 ; U5.9 4.9,54.7 5,54.8
GND_FIELD SIGNAL: length 15.6
  TOP w0.127: v1(44.2,28.7) 44.02,28.52 U1.41 ; v1(42.65,22.55) 43.85,22.55 43.95,22.65 ; L15.1 42.6,20.3 ; 42.6,20.3 v1(42.45,20.45) ; 42.6,20.3 41.95,20.3 41.75,20.1 v1(41.75,18.78) ; C20.2 43.95,23.67 v1(43.95,24.2)
  TOP w0.2: C23.2 v1(40.32,18.78) ; 43.95,22.65 43.95,23.63 C20.2
  BOTTOM w0.127: v1(44.2,28.7) 44.2,24.6 43.95,24.35 v1(43.95,24.2) ; v1(42.65,22.55) 42.65,22.45 42.45,22.25 v1(42.45,20.45)
  BOTTOM w0.2: v1(40.32,18.78) v1(41.75,18.78)
GND_SIGNAL: length 78.3
  TOP w0.127: U1.100 26.98,36.5 26.2,36.5 25.4,37.3 25.39,37.3 25.1,37.59 25.1,37.6 24.6,38.1 18.01,38.1 ; 21.03,71.15 21.04,71.16 v1(21.04,71.91) ; 16.48,39.63 16.5,39.65 22.9,39.65 ; 15.57,40.54 15.57,40.65 ; C9.2 v1(22.78,35.83) ; 22.9,39.65 22.88,39.63 v1(22.78,39.63) ; 22.9,39.65 26.35,39.65 26.73,39.27 C17.2
  TOP w0.2: v1(15.7,48.35) 20.08,48.35 v1(21.03,47.4) 21.03,71.15 ; 15.57,40.54 18.01,38.1 ; 15.57,40.65 v1(15.57,41.3)
  BOTTOM w0.127: 24.15,46.94 24.2,46.89 24.45,46.89 24.46,46.9 ; v1(22.78,35.83) v1(22.78,39.63) ; J8.8 v1(21.04,71.91)
  BOTTOM w0.2: C44.2 v1(21.03,47.4) 21.03,46.85 C49.2 23.39,46.76 C43.2 24.4,46.94 24.44,46.9 L10.1 ; v1(15.7,48.35) 15.7,47.1 C50.2 16.04,41.77 v1(15.57,41.3)
PVIN: length 21.7
  TOP w0.127: 14.44,81.15 14.49,81.1 14.63,81.1
  TOP w0.2: U11.3 5.57,74.22 5.54,74.19 4.27,74.19 4.01,73.94
  TOP w0.4: 6.11,76.55 10.71,81.15 J11.1 14.58,81.15 14.63,81.1 C72.1 C73.1 ; 6.11,76.55 U11.3 ; 6.11,76.55 4.01,74.45 R50.1
VBUS: length 90.9
  TOP w0.127: 48.8,77.75 53.6,72.95 v1(53.6,49.6) ; C74.1 41.35,81.56 41.73,81.94 45.8,81.94 46.43,81.31 J9.1
  TOP w0.2: D2.1 53.41,12.28 53.25,12.45 53.25,18.85 v1(53.4,19) ; v1(58.15,77.9) 59.1,77.9 ; 59.1,77.9 L11.2 ; 59.1,77.9 58.95,77.75 47.65,77.75 J9.1
  BOTTOM w0.127: v1(53.4,19) 53.45,19 53.6,19.15 v1(53.6,49.6)
ADC_MID: length 1.6
  TOP w0.127: C1.1 28.46,40.28 28.8,39.94 U1.96
AHS: length 5.1
  TOP w0.127: U1.39 46.03,27.72 R5.2 46.2,26.62 C6.1 46.2,26.58 R6.1
BL_5V: length 8.2
  TOP w0.127: L3.1 62,26.25 62.8,25.45 L12.2 v1(63.35,24.55) ; v1(63.35,22.55) C33.1
  TOP w0.2: L3.1 61.8,25.35 61.7,25.25 U4.6
  BOTTOM w0.127: v1(63.35,24.55) v1(63.35,22.55)
BL_ADJ: length 37.3
  TOP w0.18: R22.1 51.5,26.85 46.65,22 42.35,22 41.9,22.45 41.9,24.1 39.48,26.52 U1.125
  TOP w0.2: U4.4 56.8,25.25 56.6,25.45 R22.1
DEBUG_RX: length 27.4
  TOP w0.127: 20.73,34.94 25.81,34.94 26.23,34.52 U1.105
  TOP w0.2: J6.2 13.3,39.65 18.01,34.94 20.73,34.94
DEBUG_TX: length 28.3
  TOP w0.127: 20.7,35.4 20.9,35.2 25.95,35.2 26.23,34.92 U1.104
  TOP w0.2: J6.1 11.46,42.19 17.32,36.33 19.77,36.33 20.7,35.4
ETH_CRS: length 42.5
  TOP w0.127: U1.85 33.2,40.5 32.75,40.95 32.75,54.22 32.88,54.35 v1(33,54.35) ; v1(43.35,61.2) 43.2,61.35 U7.26 ; v1(48.04,60.64) 48.04,54.44 v1(47.85,54.25)
  BOTTOM w0.127: v1(43.35,61.2) 43.37,61.22 47.45,61.22 v1(48.04,60.64) ; v1(47.85,54.25) 33.25,54.25 33.15,54.35 v1(33,54.35)
ETH_INT: length 35.1
  TOP w0.127: R36.1 47.1,62.45 48.6,60.95 48.6,51.2 v1(47,49.6)
  TOP w0.18: U1.52 46.27,32.92 v1(47,33.65)
  BOTTOM w0.18: v1(47,33.65) v1(47,49.6)
ETH_INT_PU: length 16.9
  TOP w0.127: v1(35.85,62.45) 35.85,62.69 36.51,63.35 ; U7.11 36.51,63.35 ; 36.51,63.35 34.65,63.35 ; v1(44.9,62.45) R36.2 ; v1(35.5,64.9) R43.1
  BOTTOM w0.127: v1(44.9,62.45) v1(35.85,62.45) 35.85,64.55 v1(35.5,64.9)
ETH_LED0+: length 3.2
  TOP w0.127: 41.35,84.75 41.26,84.84 ; 41.26,84.84 41.24,84.87 J8.9 ; 41.26,84.84 R48.1
ETH_LED0-: length 53.7
  TOP w0.127: v1(27.95,60) 25.4,62.55 25.4,74.35 28.2,77.15 28.2,84 29.06,84.86 J8.10 ; U7.24 v1(42.6,60) 44.65,57.95 R47.1
  BOTTOM w0.127: v1(27.95,60) v1(42.6,60)
ETH_LED1+: length 3.3
  TOP w0.127: 22.3,84.87 22.16,84.87 22.05,84.75 ; 22.3,84.87 22.27,84.84 R46.1 ; 22.3,84.87 J8.12
ETH_LED1-: length 46.8
  TOP w0.127: R45.1 44.8,58.85 v1(43.23,60.42) 42.8,60.85 U7.25 ; J8.11 27.61,84.34 27.85,84.1 27.85,77.2 25.1,74.45 25.1,62.1 v1(26.6,60.6)
  BOTTOM w0.127: v1(43.23,60.42) 43.05,60.6 v1(26.6,60.6)
ETH_MDC: length 24.6
  TOP w0.127: v1(41.45,55.45) 41.45,58.35 40.55,59.25 U7.22 ; U1.74 37.6,55.2 v1(37.7,55.3)
  BOTTOM w0.127: v1(37.7,55.3) 37.85,55.45 v1(41.45,55.45)
ETH_MDIO: length 30.3
  TOP w0.127: U7.23 41.05,59.31 41.95,58.41 v1(41.95,56.15) 42.85,57.05 R44.1 ; v1(37.7,56.15) 37.55,56.15 36.41,55 36.4,55 35.45,54.05 35.45,41.4 36,40.85 U1.78
  BOTTOM w0.127: v1(37.7,56.15) v1(41.95,56.15)
ETH_REFCLK: length 30.1
  TOP w0.127: v1(33.95,54.75) 33.95,55 33.3,55.65 33.3,59.95 34.7,61.35 U7.15 ; v1(38.45,54.95) 38,54.5 U1.73
  BOTTOM w0.127: v1(38.45,54.95) 38.25,54.75 v1(33.95,54.75)
ETH_RESET: length 104.7
  TOP w0.127: 65.55,59.55 66.32,59.55 67.5,58.37 SW2.4 ; R37.1 v1(40.7,56.7) ; v1(49.45,35.8) 49.25,35.8 v1(47.7,34.25) ; 61,59.55 59.9,58.45 v1(59.9,56.7) ; v1(49.15,56.7) 48.92,56.48 48.92,51.12 47.85,50.05 v1(47.85,49.6) ; v1(49.95,20.05) 47.7,20.05 42.07,14.42 42.07,7.87 40.75,6.55 40.21,6.55 39.46,5.8 J3.6
  TOP w0.18: v1(47.7,34.25) 47.7,33.55 46.67,32.52 U1.51
  TOP w0.2: Q1.3 SW2.4 67.5,56.03 67.53,56 67.53,55.52 R7.1 67.53,55.48 67.53,55 67.5,54.97 67.48,54.95 C16.1 ; 61,59.55 65.55,59.55
  BOTTOM w0.127: v1(47.7,34.25) 47.7,49.47 47.83,49.6 v1(47.85,49.6) ; v1(40.7,56.7) v1(49.15,56.7) v1(59.9,56.7) ; v1(49.45,35.8) 49.95,35.3 v1(49.95,20.05)
ETH_RXD0: length 29.4
  TOP w0.127: U1.86 32.8,40.5 32.44,40.86 32.44,63.69 33.1,64.35 U7.9
ETH_RXD1: length 30
  TOP w0.127: v1(31.9,55.2) 31.9,54.45 32.15,54.2 32.15,40.7 32.4,40.45 U1.87 ; U7.10 33.2,63.85 32.75,63.4 32.75,55.5 v1(33.05,55.2)
  BOTTOM w0.127: v1(33.05,55.2) v1(31.9,55.2)
ETH_RXDV: length 1.6
  TOP w0.127: U7.8 R42.1
ETH_RXER: length 43.4
  TOP w0.127: U1.88 32,40.4 31.85,40.55 31.85,53.65 v1(31.65,53.85) ; U7.28 43.15,62.35 44.35,61.15 44.35,60.25 v1(44.85,59.75) R49.2 ; v1(47.2,53.65) v1(47.2,59.75)
  BOTTOM w0.127: v1(31.65,53.85) 47.07,53.85 47.2,53.72 v1(47.2,53.65) ; v1(44.85,59.75) v1(47.2,59.75)
ETH_TXD0: length 27.3
  TOP w0.127: 34.2,55.5 v1(34,55.7) 33.8,55.9 33.8,60 34.65,60.85 U7.16 ; v1(36.2,55.5) 35.2,54.5 35.2,41.25 35.6,40.85 U1.79
  BOTTOM w0.127: v1(34,55.7) 34.2,55.5 v1(36.2,55.5)
ETH_TXD1: length 23.5
  TOP w0.127: U7.17 35.4,60 34.9,59.5 34.9,41.16 35.2,40.86 U1.80
ETH_TXEN: length 25.4
  TOP w0.127: v1(36.15,56.3) 36.15,58.3 36.7,58.85 38.8,58.85 39.55,59.6 U7.20 ; v1(34.35,56.5) 34.35,56.3 34.62,56.02 34.62,41.08 34.8,40.9 U1.81
  BOTTOM w0.127: v1(36.15,56.3) 34.5,56.3 34.35,56.45 v1(34.35,56.5)
ETH_VCCD: length 99.9
  TOP w0.127: v1(46.5,57.5) 46.5,57.8 R47.2 ; v1(41.8,69.75) 41.95,69.75 42,69.8 ; R47.2 46.35,57.54 ; R47.2 46.35,58.36 46.33,58.38 46.33,58.83 R45.2 ; 46.35,57.54 R44.2 46.33,57.08 46.33,57.52 46.35,57.54 ; R38.1 v1(39.75,56.8) ; 42,69.8 46.27,69.8 46.55,69.52 RN2.8 RN2.7 RN2.6 RN2.5 ; 42,69.8 41.8,69.8 40.6,71 40.6,73.8 v1(40.59,73.81) ; U7.7 38.55,67.27 38.42,67.4 38.2,67.4 R42.2 38.05,72.8 39.08,73.83 40.58,73.83 v1(40.59,73.81) ; v1(40.59,73.81) R35.2 ; R48.2 41.12,85.88 22.3,85.88 22.06,85.64 R46.2 ; v1(32.75,69.45) 32.75,68.6 33.85,67.5 33.85,65.39 33.88,65.37 33.88,64.92 R43.2 33,64.9 31.9,63.8 v1(31.9,57.35)
  TOP w0.2: L5.2 46.37,54.22 C54.1 C51.1 46.35,56.12 R44.2 ; v1(41.35,86) R48.2
  BOTTOM w0.127: 39.95,57.35 46.35,57.35 v1(46.5,57.5) ; 39.95,57.35 R38.1 v1(39.75,56.8) ; 39.95,57.35 v1(31.9,57.35) ; v1(32.75,69.45) 41.5,69.45 v1(41.8,69.75)
  BOTTOM w0.2: v1(41.35,86) 40.59,85.24 v1(40.59,73.81)
GPG7: length 32
  TOP w0.127: v1(30.35,41.25) 30.35,41.5 29.75,42.1 29.15,42.1 28.7,42.55 28.7,44.69 28.81,44.8 R31.1 ; U1.38 42.3,27.32 42.28,27.3 42.15,27.3
  TOP w0.4: v1(30.35,27.3) 42.15,27.3
  BOTTOM w0.4: v1(30.35,41.25) 30.35,41.2 30.07,40.92 30.07,27.58 v1(30.35,27.3)
HPOUTL: length 16.9
  TOP w0.127: U1.102 26.98,35.7 26.2,35.7 24.36,37.54 16.86,37.54
  TOP w0.2: 16.86,37.54 13.41,40.99 v1(13.41,41.3)
  BOTTOM w0.2: v1(13.41,41.3) 13.41,42.02 C40.1
HPOUTR: length 29.5
  TOP w0.127: v1(14.43,41.3) 14.43,40.97 17.6,37.8 24.5,37.8 26.2,36.1 26.98,36.1 U1.101
  BOTTOM w0.2: v1(14.43,41.3) 14.43,54.64 14.05,55.02 C41.2
ISI_HSYNC: length 24.6
  TOP w0.127: J3.9 37.96,6.74 v1(36.7,8) ; U1.21 36.8,22.73 35.7,21.63 35.7,16.76 34.95,16.01 34.95,11.24 38.19,8 v1(38.55,8)
  BOTTOM w0.127: v1(36.7,8) v1(38.55,8) 38.9,8
ISI_PCLK: length 18.5
  TOP w0.127: U1.22 37.2,22.77 35.99,21.56 35.99,16.69 35.2,15.9 35.2,11.35 38,8.55 39.06,8.55 39.08,8.52 39.52,8.52 R16.1
ISI_PWDN: length 21.8
  TOP w0.127: 36,22.96 36,22.8 35.15,21.95 35.15,21.89 ; 34.37,11.07 38.46,6.98 J3.8
  TOP w0.18: 35.15,21.89 35.12,21.87 35.12,17.07 34.3,16.25 34.3,11.14 34.37,11.07
  TOP w0.2: U1.19 36,22.96
ISI_SCL: length 52.9
  TOP w0.127: U1.47 45.02,30.92 45.25,31.15 52.15,31.15 v1(52.45,30.85) ; v1(52,19.55) 47.62,19.55 42.33,14.25 42.33,7.73 40.85,6.25 40.35,6.25 39.96,5.86 J3.5 39.95,4.15 v1(39.95,3.15) ; R19.2 v1(46.2,3.6)
  BOTTOM w0.127: v1(52,19.55) 52.45,20 v1(52.45,30.85) ; v1(39.95,3.15) 40.4,3.6 v1(46.2,3.6)
ISI_SCLK: length 19.4
  TOP w0.127: R15.1 40.45,9.04 40.29,9.2 37.75,9.2 35.5,11.45 35.5,15.8 36.24,16.54 36.24,21.45 37.6,22.81 U1.23
ISI_SDA: length 51.7
  TOP w0.127: R20.2 v1(44.85,4.95) ; v1(52.95,31.41) 45.11,31.41 45.02,31.32 U1.48 ; J3.3 40.95,4.16 v1(40.95,5.5) 40.95,5.95 42.59,7.59 42.59,14.11 47.52,19.05 v1(52.6,19.05)
  BOTTOM w0.127: v1(52.6,19.05) 52.95,19.4 v1(52.95,31.41) ; v1(44.85,4.95) 41.5,4.95 v1(40.95,5.5)
ISI_VSYNC: length 21.9
  TOP w0.127: J3.7 38.96,6.84 34.65,11.15 34.65,11.25 ; 35.4,16.9 35.4,21.75 36.4,22.75 U1.20
  TOP w0.18: 34.65,11.25 34.65,16.15 35.4,16.9
LED+: length 21.3
  TOP w0.127: D1.1 63.9,23.65 63.45,23.2 58.3,23.2 58.15,23.05 58.1,23.05 C34.1
  TOP w0.2: v1(58.95,24.5) U4.5 ; D1.1 64.53,26.4 64.85,26.72 64.85,31.05 v1(66.88,33.08)
  BOTTOM w0.127: v1(58.15,22.95) 58.95,23.75 v1(58.95,24.5)
  BOTTOM w0.2: v1(66.88,33.08) 65.83,33.08 J2.2
LED-: length 11.3
  TOP w0.2: 58,28.95 58,29.15 58.25,29.4 ; 58,28.95 U4.3 ; 58,28.95 R21.1 58.35,29.3 58.35,29.95 58.4,30 60.45,30 v1(62.3,31.85)
  BOTTOM w0.2: J2.1 63,32.55 v1(62.3,31.85)
LHSYNC: length 36
  TOP w0.127: 59.3,49.05 57.05,46.8 42.25,46.8 v1(38.6,43.15) ; U1.75 37.2,42.5 v1(36.55,43.15)
  TOP w0.2: 59.3,49.05 v1(60.1,49.05)
  BOTTOM w0.127: v1(36.55,43.15) v1(38.6,43.15)
  BOTTOM w0.2: v1(60.1,49.05) 61.1,48.05 62.15,48.05 62.18,48.02 62.62,48.02 62.65,48.05 J2.32
LPCLK: length 35.5
  TOP w0.127: v1(59.45,48.5) 57.5,46.55 42.75,46.55 v1(38.6,42.4) ; v1(36.5,42.4) 36.8,42.1 U1.76
  BOTTOM w0.127: v1(36.5,42.4) v1(38.6,42.4)
  BOTTOM w0.2: v1(59.45,48.5) 60.05,48.5 61.45,47.1 61.45,47.05 J2.30
LRADC: length 43.5
  TOP w0.127: R25.1 61.35,17.15 61.35,17.67 61.25,17.77 61.25,18.7 62.05,19.5 ; v1(54.35,32) 50.47,28.12 U1.40 ; 62.05,19.5 62.7,20.15 ; 62.05,19.5 54.55,19.5 54.35,19.7 v1(54.35,19.75) 54.4,19.75 ; 62.7,20.15 R23.1 62.8,21.25 62.9,21.15 65.65,21.15 66.57,22.07 66.57,22.14 67.28,22.85 SW3.4 ; 62.7,20.15 C39.1
  BOTTOM w0.127: v1(54.35,19.75) v1(54.35,32)
LVD0: length 28.8
  TOP w0.127: 58.92,44.28 58.4,44.8 44.7,44.8
  TOP w0.2: 44.7,44.8 40.4,40.5 U1.67 ; 58.92,44.28 v1(59.3,43.9)
  BOTTOM w0.2: v1(59.3,43.9) 59.85,43.35 64.3,43.35 64.5,43.55 J2.23
LVD1: length 29.3
  TOP w0.127: 59.05,45.1 44.45,45.1
  TOP w0.2: 59.05,45.1 60.2,43.95 v1(60.35,43.95) ; 44.45,45.1 40,40.65 U1.68
  BOTTOM w0.2: v1(60.35,43.95) 60.5,43.95 60.64,44.09 60.68,44.05 J2.24
LVD2: length 29.9
  TOP w0.127: v1(59.38,45.58) 59.27,45.58 59.1,45.4 44.19,45.4
  TOP w0.2: U1.69 39.6,40.81 44.19,45.4
  BOTTOM w0.2: J2.25 60.4,44.55 v1(59.38,45.58)
LVD3: length 30.7
  TOP w0.127: 43.95,45.7 58.55,45.7 59.05,46.2 59.45,46.2
  TOP w0.2: v1(59.95,46.2) 59.45,46.2 ; 43.95,45.7 39.2,40.95 U1.70
  BOTTOM w0.2: J2.26 61.1,45.05 v1(59.95,46.2)
LVD4: length 31.6
  TOP w0.127: v1(59.45,47) 58.45,46 43.75,46
  TOP w0.2: U1.71 38.8,41.05 43.75,46
  BOTTOM w0.2: v1(59.45,47) 59.95,47 61.4,45.55 J2.27
LVD5: length 32.5
  TOP w0.127: 59.45,47.75 59.4,47.75 57.94,46.29 43.49,46.29 38.4,41.2 U1.72
  TOP w0.2: 59.45,47.75 v1(59.95,47.75)
  BOTTOM w0.2: v1(59.95,47.75) 61.65,46.05 J2.28
LVD6: length 26.1
  TOP w0.2: v1(59.4,39.2) 59.25,39.2 57.23,41.23 49.98,41.23 44.47,35.72 U1.59
  BOTTOM w0.2: J2.15 61.3,39.55 60.95,39.2 v1(59.4,39.2)
LVD7: length 25.9
  TOP w0.2: v1(60.3,39.8) 59.2,39.8 57.4,41.6 49.75,41.6 44.27,36.12 U1.60
  BOTTOM w0.2: v1(60.3,39.8) 61,39.8 61.25,40.05 J2.16
LVD8: length 25.9
  TOP w0.2: v1(59.4,40.4) 57.7,42.1 49.75,42.1 44.17,36.52 U1.61
  BOTTOM w0.2: v1(59.4,40.4) 60.95,40.4 61.1,40.55 J2.17
LVD9: length 26
  TOP w0.2: U1.62 44.02,36.92 49.65,42.55 57.95,42.55 59.55,40.95 v1(60.25,40.95)
  BOTTOM w0.2: 60.45,40.95 v1(60.25,40.95) 60.35,41.05 J2.18
LVD10: length 25.7
  TOP w0.2: U1.63 43.87,37.32 49.48,42.92 58.42,42.92 v1(59.4,41.95)
  BOTTOM w0.2: J2.19 59.8,41.55 v1(59.4,41.95)
LVD11: length 28.6
  TOP w0.127: 43.95,43.5 44.95,44.5 57.85,44.5 58.85,43.5
  TOP w0.2: 58.85,43.5 60.1,42.25 v1(60.45,42.25) ; 43.95,43.5 40.8,40.35 U1.66
  BOTTOM w0.2: J2.20 60.65,42.05 v1(60.45,42.25)
LVD12: length 26.7
  TOP w0.2: U1.53 45.77,33.32 51.15,38.7 55.75,38.7 v1(59.4,35.05)
  BOTTOM w0.2: v1(59.4,35.05) 63.1,35.05 63.6,35.55 J2.7
LVD13: length 26.6
  TOP w0.2: U1.54 45.47,33.72 50.88,39.12 55.88,39.12 59.25,35.75 v1(60.35,35.75)
  BOTTOM w0.2: J2.8 63.45,36.05 63.15,35.75 v1(60.35,35.75)
LVD14: length 26.4
  TOP w0.2: v1(59.4,36.45) 59.25,36.45 56.12,39.58 50.67,39.58 45.22,34.12 U1.55
  BOTTOM w0.2: v1(59.4,36.45) 63.3,36.45 63.4,36.55 J2.9
LVD15: length 26.4
  TOP w0.2: v1(60.35,37.15) 59.2,37.15 56.35,40 50.5,40 45.02,34.52 U1.56
  BOTTOM w0.2: J2.10 63.5,37.05 ; 63.5,37.05 63.4,37.15 v1(60.35,37.15) ; 63.5,37.05 63.55,37
LVD16: length 26.3
  TOP w0.2: U1.57 44.82,34.92 50.35,40.45 56.75,40.45 v1(59.4,37.8)
  BOTTOM w0.2: v1(59.4,37.8) 63.55,37.8 63.8,37.55 J2.11
LVD17: length 26.2
  TOP w0.2: U1.58 44.67,35.32 50.2,40.85 56.95,40.85 59.35,38.45 v1(60.35,38.45)
  BOTTOM w0.2: v1(60.35,38.45) 63.5,38.45 63.9,38.05 J2.12
LVDE: length 46.1
  TOP w0.18: v1(60.15,49.85) 62.35,47.65 62.35,34.95 61.17,33.77 59.92,33.77 55.35,38.35 53.05,38.35 46.82,32.12 U1.50
  BOTTOM w0.18: J2.34 63,49.05 62.2,49.85 v1(60.15,49.85)
LVSYNC: length 43.8
  TOP w0.18: U1.49 46.87,31.72 53.15,38 55.2,38 59.8,33.4 61.27,33.4 62.73,34.85 62.73,48.23 v1(61.8,49.15)
  BOTTOM w0.18: v1(61.8,49.15) 62.4,48.55 J2.33
MIC_BIAS: length 17.9
  TOP w0.127: U1.95 29.2,40.21 28.62,40.79 26.4,40.79
  TOP w0.2: v1(19.51,40.79) 26.4,40.79
  BOTTOM w0.127: R32.1 20.01,47.86 19.51,47.35 19.51,45.85
  BOTTOM w0.2: v1(19.51,40.79) 19.51,45.85
MIC_INN: length 26.7
  TOP w0.127: v1(18.11,38.76) 18.49,38.38 25.77,38.38 26.15,38 26.15,37.62 26.45,37.32 U1.98
  BOTTOM w0.127: 18.11,39.71 18.11,46.26 18.07,46.3
  BOTTOM w0.2: 18.07,39.75 18.11,39.71 ; 18.07,39.75 C46.1 ; 18.07,39.75 18.07,39.33 18.11,39.29 v1(18.11,38.76) ; C46.1 17.98,46.85 C48.2 ; C46.1 C50.1
MIC_INP: length 26.1
  TOP w0.127: U1.97 27,38.3 26.67,38.63 20.39,38.63 v1(20.14,38.89)
  TOP w0.2: v1(18.91,46.17) v1(20.23,46.17)
  BOTTOM w0.127: 20.14,39.42 20.14,46.26 20.1,46.3 C49.1
  BOTTOM w0.2: v1(18.91,46.17) C46.2 19,46.85 C45.2 ; v1(20.14,38.89) 20.14,39.42 20.23,39.51 v1(20.23,46.17) 20.23,46.63 C49.1
MUTE: length 24.2
  TOP w0.127: R31.2 30.07,44.83 30.07,45.27 29.72,45.62 21.05,45.62
  TOP w0.2: v1(8.71,46) 9.09,45.62 21.05,45.62
  BOTTOM w0.2: U5.5 v1(8.71,46) 8.71,45.05 R30.2
NALE: length 29.2
  TOP w0.2: v1(9.98,28.22) 14.25,28.22 14.37,28.1 17.33,28.1 17.75,28.52 U1.120
  BOTTOM w0.127: 9.89,27.95 9.89,28.13 v1(9.98,28.22) 10.23,28.47
  BOTTOM w0.2: U2.17 9.89,27.95
NBUSY0: length 27.2
  TOP w0.127: U1.116 26.31,30.12 26.19,30 18,30 17.75,30.25 v1(17.73,30.25)
  BOTTOM w0.127: 14.89,14.2 14.89,14.01
  BOTTOM w0.2: 14.89,14.2 U2.7 14.89,26.6 14.9,26.6 17.73,29.43 v1(17.73,30.25) ; 14.89,14.01 R9.2
NCLE: length 28.4
  TOP w0.2: U1.119 17.2,28.92 16.83,28.55 15.55,28.55 15.25,28.86 v1(11.5,28.86)
  BOTTOM w0.2: v1(11.5,28.86) 10.39,27.74 U2.16
NCS0: length 30.2
  TOP w0.127: 24.6,27.72 22.8,27.72
  TOP w0.2: v1(13.92,27.59) 14.35,27.15 20.08,27.15 20.65,27.72 22.8,27.72 ; U1.122 24.6,27.72 ; v1(13.89,14.89) R11.1
  BOTTOM w0.2: v1(13.92,27.59) 13.89,27.59 13.6,27.3 13.6,17.81 13.89,17.52 U2.9 v1(13.89,14.89)
NCS1: length 28.7
  TOP w0.2: U3.7 23.32,17.3 22.68,16.66 v1(19.38,16.66) ; U1.121 19.65,28.12 19.49,27.97 v1(19.38,27.97)
  BOTTOM w0.2: v1(19.38,27.97) v1(19.38,16.66)
ND0: length 21.6
  TOP w0.2: U1.107 v1(8.62,33.72)
  BOTTOM w0.127: 8.71,33.68 8.62,33.77 v1(8.62,33.72)
  BOTTOM w0.2: v1(8.62,33.72) 8.39,33.96 U2.29
ND1: length 21.4
  TOP w0.127: 10.9,33.32 10.05,33.32
  TOP w0.2: 10.05,33.32 9.85,33.32 9.7,33.17 v1(9.47,33.17) ; U1.108 10.9,33.32
  BOTTOM w0.2: U2.30 8.89,34.66 9.55,34 9.55,33.25 v1(9.47,33.17)
ND2: length 20.9
  TOP w0.127: 11.9,32.92 10.75,32.92
  TOP w0.2: v1(10.49,32.79) 10.62,32.79 10.75,32.92 ; U1.109 11.9,32.92
  BOTTOM w0.2: v1(10.49,32.79) 10.49,33.76 9.39,34.86 U2.31
ND3: length 20.5
  TOP w0.2: v1(11.5,32.41) 11.62,32.52 U1.110
  BOTTOM w0.2: v1(11.5,32.41) 11.5,32.94 11.5,32.95 11.5,33.45 9.89,35.06 U2.32
ND4: length 17.6
  TOP w0.2: v1(14.3,31.9) 14.52,32.12 U1.111
  BOTTOM w0.127: v1(14.3,31.9) 14.3,32.03 14.39,32.12
  BOTTOM w0.2: U2.41 14.39,32.12
ND5: length 17.3
  TOP w0.2: U1.112 15.26,31.72 v1(15.06,31.52)
  BOTTOM w0.127: v1(15.06,31.52) 15.06,31.65 14.89,31.82
  BOTTOM w0.2: U2.42 14.89,31.82
ND6: length 17
  TOP w0.127: v1(15.95,31.14) 15.95,31.2 16.1,31.35 26.28,31.35 26.31,31.32 U1.113
  BOTTOM w0.127: 15.95,31.39 v1(15.95,31.14)
  BOTTOM w0.2: U2.43 15.39,31.95 15.95,31.39
ND7: length 16.7
  TOP w0.127: U1.114 26.31,30.92 26.14,31.1 17.8,31.1 17.46,30.76 v1(16.97,30.76)
  BOTTOM w0.2: U2.44 15.89,32.46 17,31.35 17,30.79 v1(16.97,30.76)
NRE: length 24.5
  TOP w0.127: v1(16.08,29.11) 16.29,29.32 16.45,29.32
  TOP w0.2: U1.118 16.45,29.32
  BOTTOM w0.127: v1(16.08,29.11) 16.33,29.36
  BOTTOM w0.2: v1(16.08,29.11) 16.08,28.58 14.39,26.89 U2.8
NWR: length 30.3
  TOP w0.127: U1.117 v1(9.96,29.72)
  BOTTOM w0.2: U2.18 9.39,29.15 v1(9.96,29.72)
OUTLM: length 14.1
  TOP w0.2: v1(10.74,51.33) 5.85,51.33 4.71,52.48 J4.2
  BOTTOM w0.2: v1(10.74,51.33) 11.25,50.83 U5.3
OUTLP: length 17.5
  TOP w0.2: J4.1 3.38,55.02 6.18,52.22 12.14,52.22 v1(12.52,51.84)
  BOTTOM w0.2: v1(12.52,51.84) 13.79,50.57 U5.1
OUTRM: length 15.2
  TOP w0.2: J5.1 10.23,59.08 11.25,58.06 v1(11.25,53.87)
  BOTTOM w0.127: U5.14 v1(11.25,53.87)
OUTRP: length 19.5
  TOP w0.2: J5.2 11.38,61.62 13.79,59.21 v1(13.79,53.87)
  BOTTOM w0.127: U5.16 v1(13.79,53.87)
RTC_XIN: length 6.9
  TOP w0.127: C2.1 27.57,44.31 27.55,44.29 Y1.1 27.55,41.65 27.75,41.45 28.8,41.45 30,40.25 U1.93
RTC_XOUT: length 9.4
  TOP w0.127: U1.94 29.6,40.29 28.74,41.15 25.2,41.15 24.75,41.6 Y1.2 24.75,44.29 24.73,44.31 C3.1
RTCVDD33: length 35.2
  TOP w0.127: 30.3,42.36 30.3,42.25 v1(30.35,42.2) ; 30.3,42.36 30.41,42.25 30.7,42.25 31,41.95 31,40.55 31.2,40.35 U1.90 ; 30.3,42.36 R3.2 30.28,42.83 C7.1
  TOP w0.2: R4.1 4.25,45.05 6.37,42.93 23.22,42.93 v1(23.6,42.55)
  BOTTOM w0.127: 29.15,42.55 30,42.55 v1(30.35,42.2)
  BOTTOM w0.2: 29.15,42.55 v1(23.6,42.55)
SD_CD: length 30
  TOP w0.127: 14.9,24.32 J1.9 ; U1.115 v1(18.76,30.52)
  TOP w0.2: 14.9,24.32 14.39,24.32 14.05,24.66 v1(5.79,24.66) ; v1(18.76,24.3) 16.6,24.3 16.58,24.32 J1.9
  BOTTOM w0.2: v1(18.76,30.52) v1(18.76,24.3) ; R13.1 3.52,24.66 v1(5.79,24.66)
SD_CLK: length 14.2
  TOP w0.127: 27.25,20.35 v1(26.87,20.35)
  TOP w0.2: U1.4 30,22.8 29.26,22.05 29.23,22.05 28.65,21.47 v1(28.65,20.35) ; v1(26.87,20.35) 19.02,20.35 18.76,20.09
  BOTTOM w0.2: v1(28.65,20.35) 28.5,20.2 27.1,20.2 26.95,20.35 v1(26.87,20.35)
SD_CMD: length 32.6
  TOP w0.127: 28.45,22.32 29.1,22.32 29.6,22.82 U1.3 ; 11.8,17.72 11.93,17.72
  TOP w0.2: 11.8,17.72 11.82,17.75 11.82,17.82 ; v1(5.66,19.96) 9.68,19.96 11.82,17.82 ; 11.82,17.82 11.93,17.72 J1.3 17.62,17.72 19.86,19.96 26.11,19.96 v1(26.36,19.71) ; v1(26.36,23.01) 27.4,23.01 28.09,22.32 28.45,22.32
  BOTTOM w0.2: v1(26.36,23.01) 26.36,21.91 25.99,21.54 25.99,20.09 v1(26.36,19.71) ; RN1.2 5.29,20.34 v1(5.66,19.96)
SD_D0: length 29.8
  TOP w0.127: 26.25,20.85 v1(27.51,20.85)
  TOP w0.2: v1(4.27,21.49) 4.9,22.12 J1.7 21.28,22.12 22.55,20.85 26.25,20.85 ; U1.5 30.4,22.54 29.41,21.55 v1(29.41,20.85)
  BOTTOM w0.2: RN1.1 4.27,20.98 v1(4.27,21.49) ; v1(29.41,20.85) 29.22,21.05 27.9,21.05 27.7,20.85 v1(27.51,20.85)
